# EAGLE board SparkFun_XBee_Arduino_Shield_Qwiic-Panel (EAGLE 9.6.2), part 1 of 3
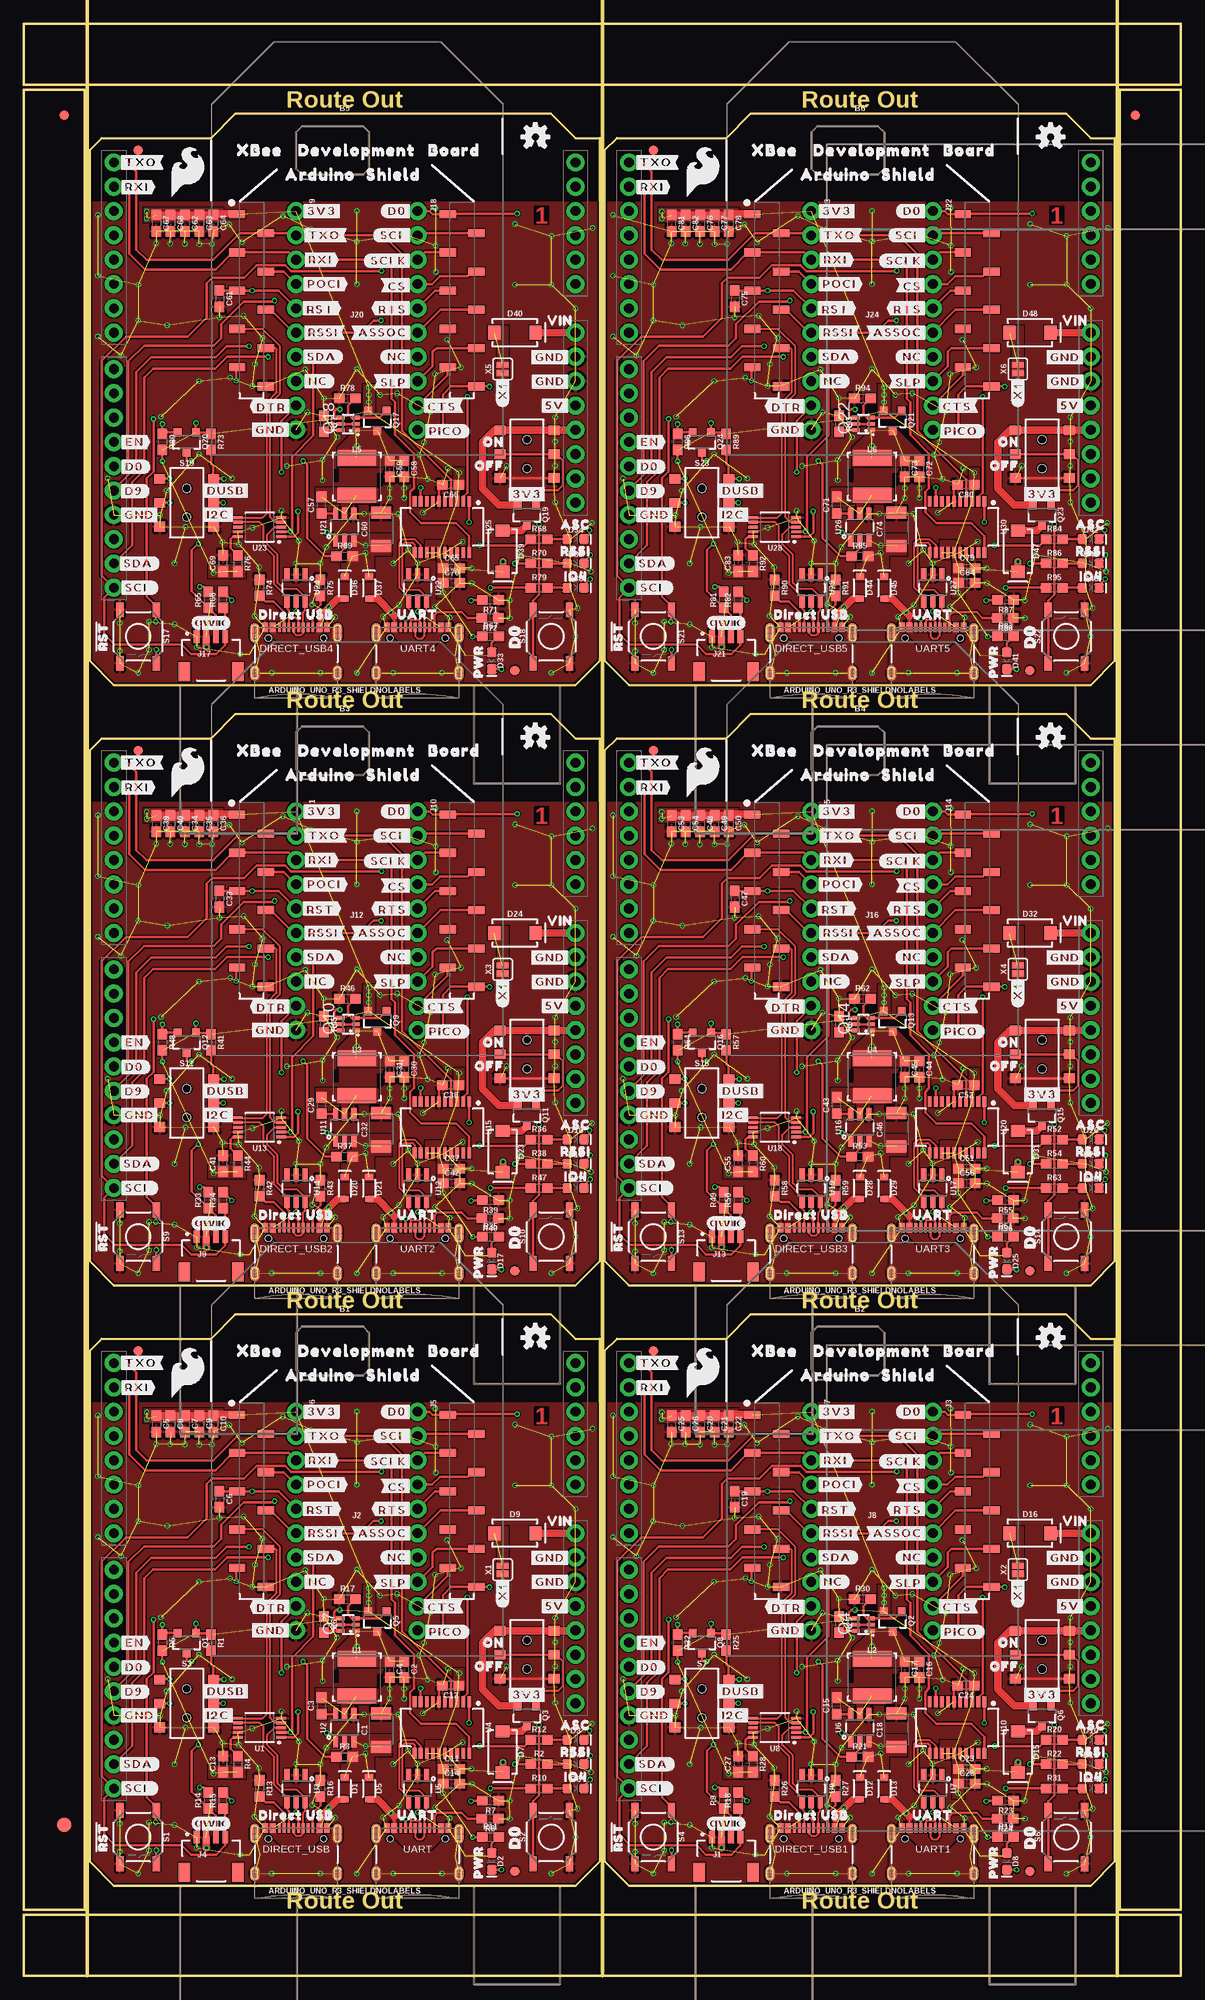
[diagram p0: board, top side]
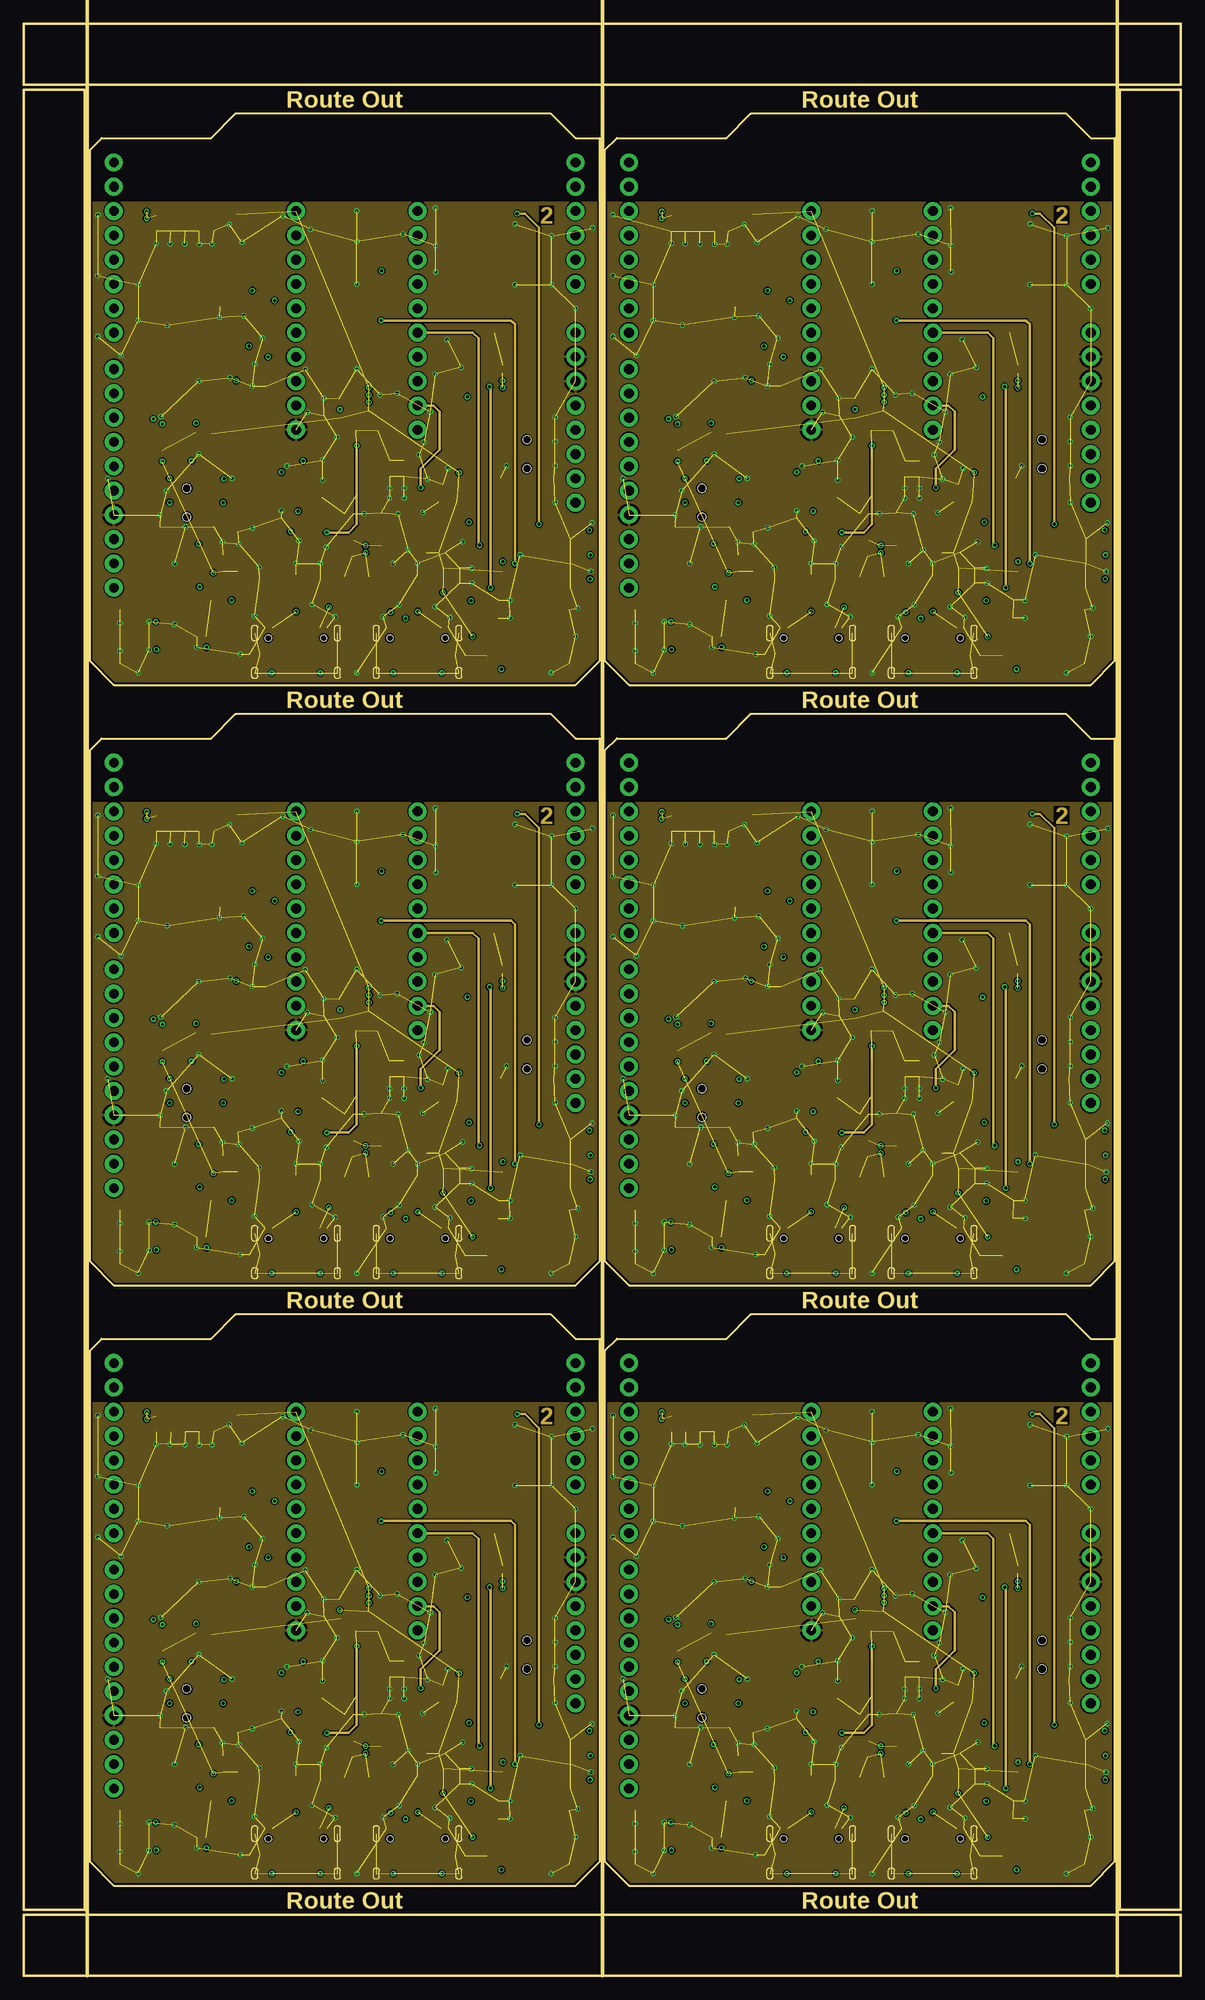
[diagram p1: board, inner layer Route2]
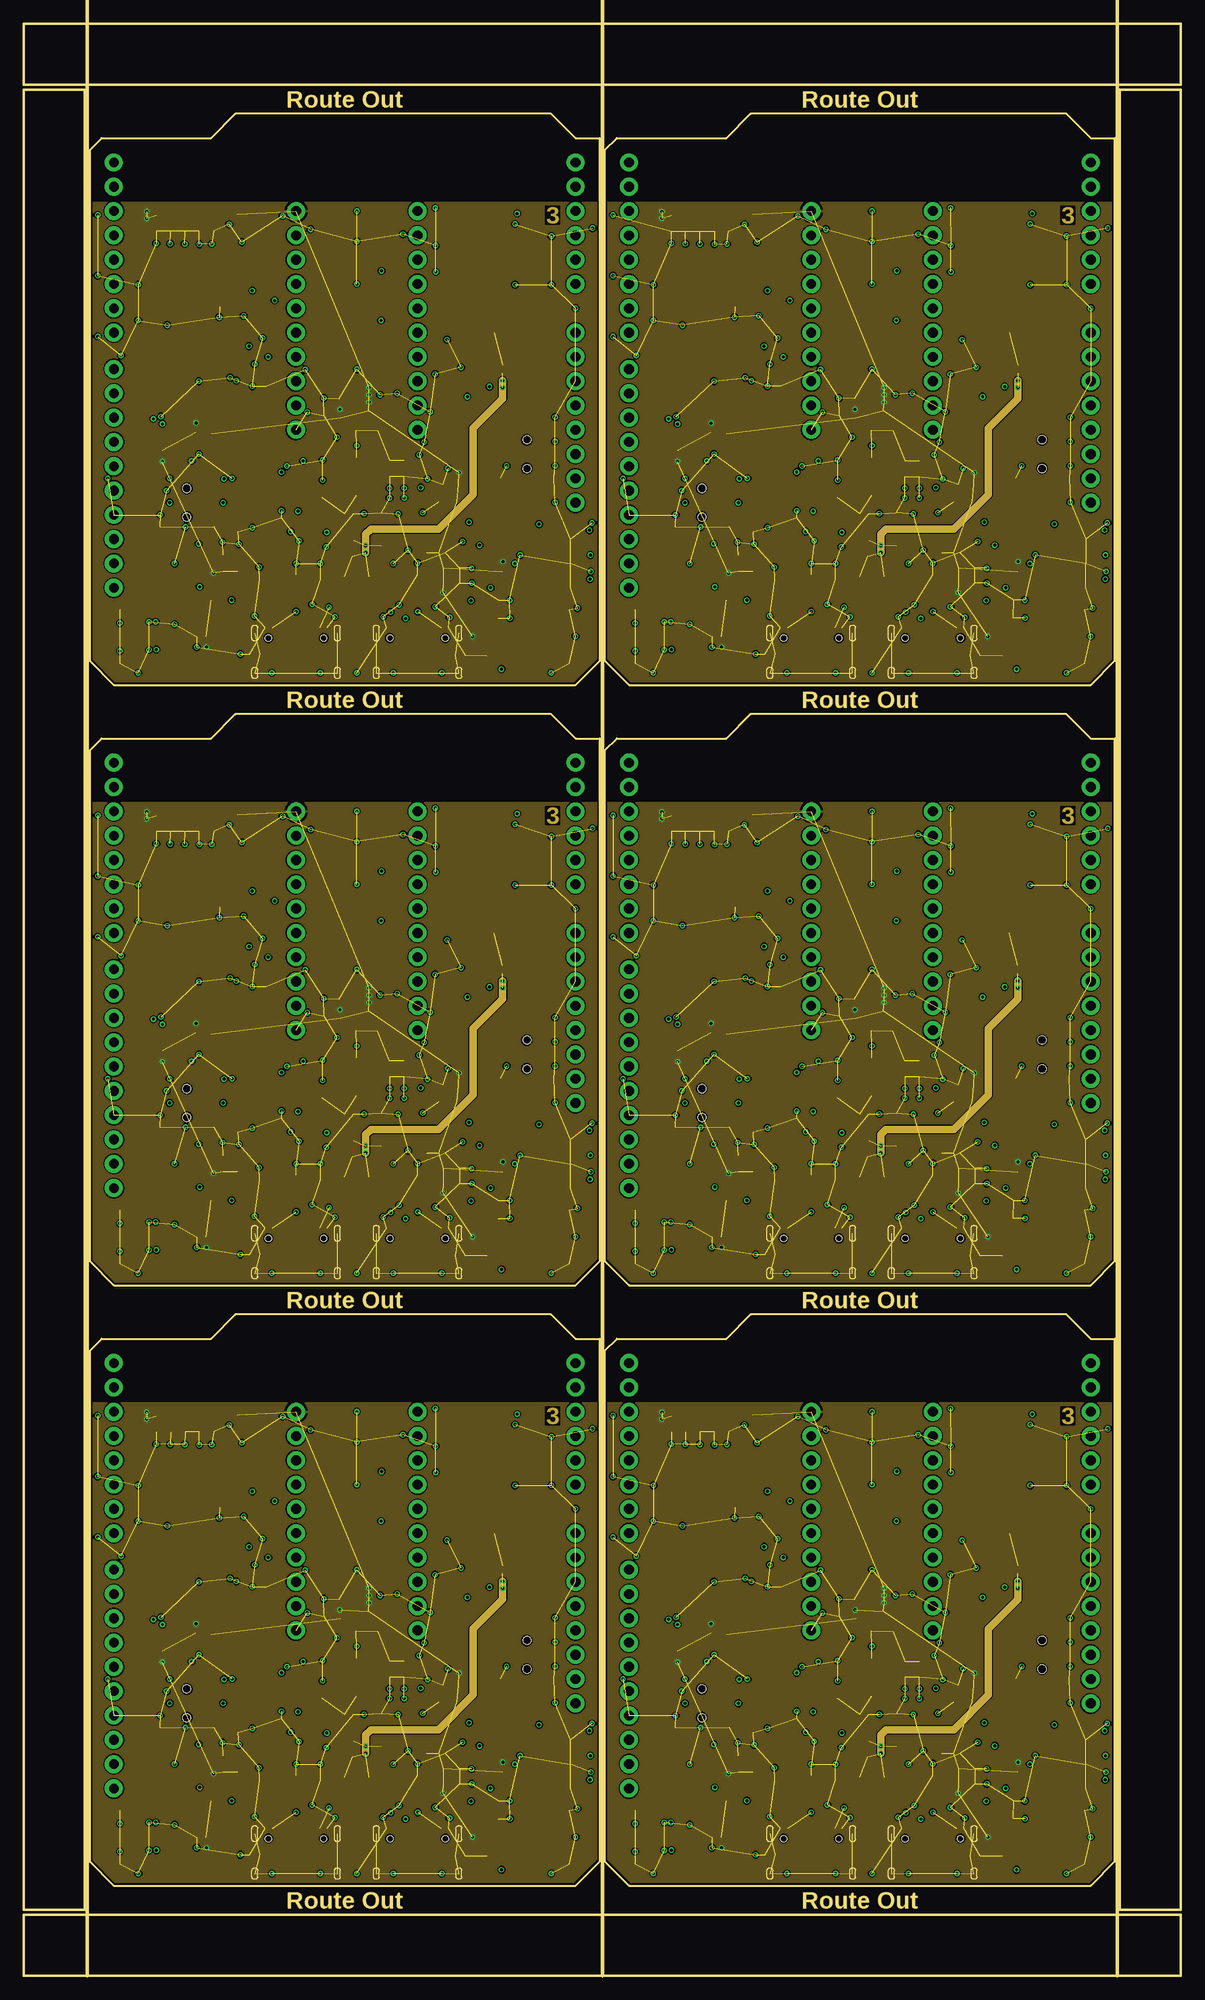
[diagram p2: board, inner layer Route15]
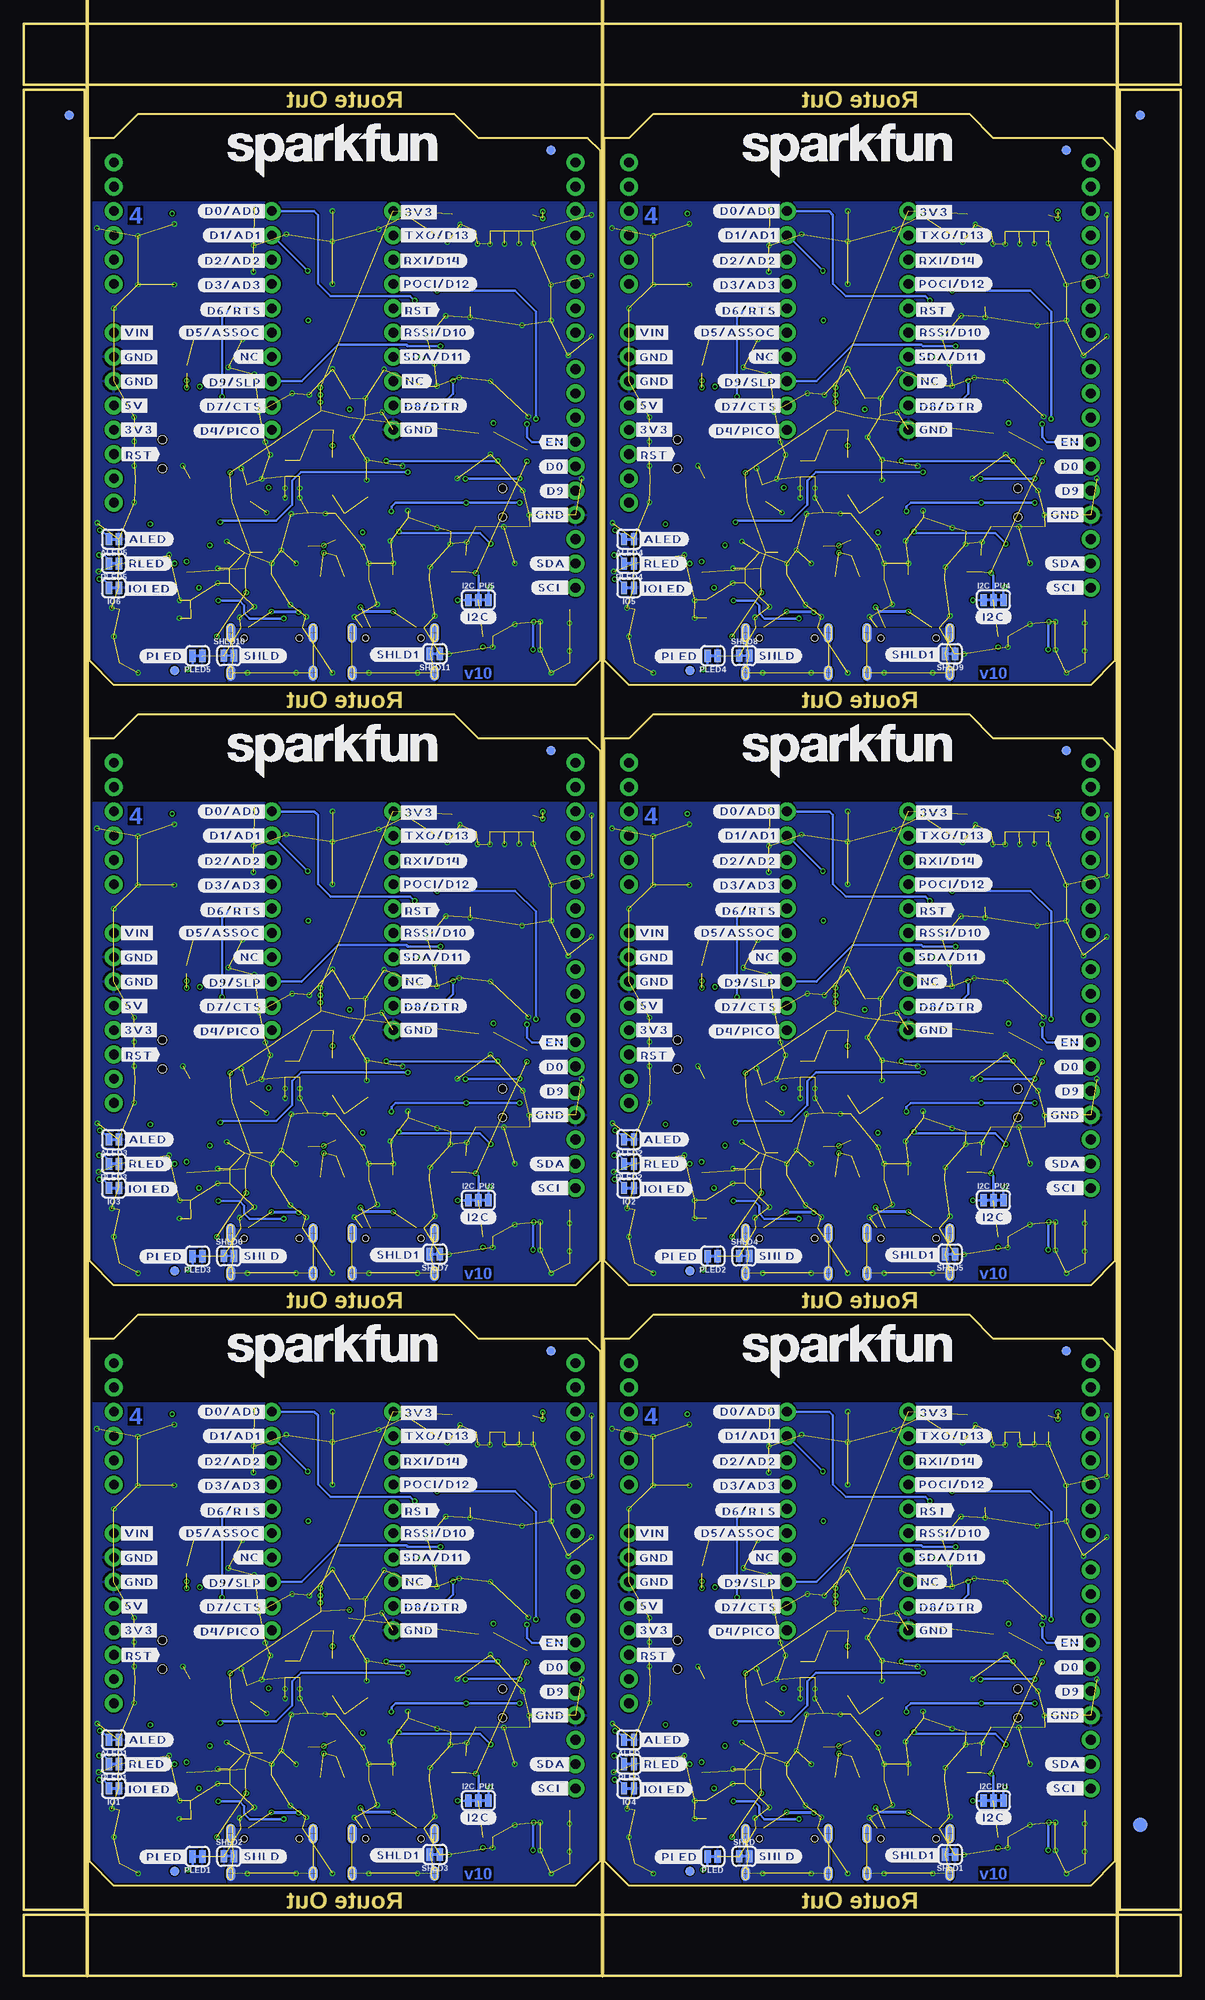
[diagram p3: board, bottom side, seen from below]

Size 120.9 x 203.96 mm. Coordinates in mm from the lower left corner, seen from the top.
Outline: 6.86,65.28 6.86,11.94 9.4,9.4 57.66,9.4 60.2,11.94 60.2,66.55 57.66,66.55 55.12,69.09 22.1,69.09 19.56,66.55 8.13,66.55 6.86,65.28
Outline: 60.71,65.28 60.71,11.94 63.25,9.4 111.51,9.4 114.05,11.94 114.05,66.55 111.51,66.55 108.97,69.09 75.95,69.09 73.41,66.55 61.98,66.55 60.71,65.28
Outline: 6.86,128.02 6.86,74.68 9.4,72.14 57.66,72.14 60.2,74.68 60.2,129.29 57.66,129.29 55.12,131.83 22.1,131.83 19.56,129.29 8.13,129.29 6.86,128.02
Outline: 60.71,128.02 60.71,74.68 63.25,72.14 111.51,72.14 114.05,74.68 114.05,129.29 111.51,129.29 108.97,131.83 75.95,131.83 73.41,129.29 61.98,129.29 60.71,128.02
Outline: 6.86,190.75 6.86,137.41 9.4,134.87 57.66,134.87 60.2,137.41 60.2,192.02 57.66,192.02 55.12,194.56 22.1,194.56 19.56,192.02 8.13,192.02 6.86,190.75
Outline: 60.71,190.75 60.71,137.41 63.25,134.87 111.51,134.87 114.05,137.41 114.05,192.02 111.51,192.02 108.97,194.56 75.95,194.56 73.41,192.02 61.98,192.02 60.71,190.75
Outline: 0,6.35 120.9,6.35 120.9,0 0,0 0,6.35
Outline: 114.55,197.1 120.9,197.1 120.9,6.86 114.55,6.86 114.55,197.1
Outline: 0,203.96 120.9,203.96 120.9,197.61 0,197.61 0,203.96
Outline: 0,197.1 6.35,197.1 6.35,6.86 0,6.86 0,197.1
Copper layers (1*2*15*16): Top 0.035559375mm / dielectric 0.47751875mm / Route2 0.035559375mm / dielectric 0.47751875mm / Route15 0.035559375mm / dielectric 0.47751875mm / Bottom 0.035559375mm
Design rules "SparkFun_XBee_Arduino_Shield_Qwiic": minimum track width 5mil, minimum drill 0.2mm, track to track 5mil, track to pad 5mil, pad to pad 5mil, via to via 5mil, smd to smd 5mil, copper to edge 7mil, drill to drill 7mil, minimum pad ring 5mil, minimum via ring 5mil, stop-mask expansion 2.5mil, vias tented up to drill 25mil, thermal gap 10mil
Net classes: 2 Diff pairs: width 0.203 mm, drill 0.305 mm, clearance 0.152 mm
tRestrict: area 37,30.3 to 37.4,31.4; area 32.4,30.7 to 32.8,31.9; area 90.9,30.3 to 91.3,31.4; area 86.2,30.7 to 86.6,31.9; area 37,93 to 37.4,94.2; area 32.4,93.4 to 32.8,94.6; area 90.9,93 to 91.3,94.2; area 86.2,93.4 to 86.6,94.6; area 37,155.8 to 37.4,156.9; area 32.4,156.2 to 32.8,157.3; area 90.9,155.8 to 91.3,156.9; area 86.2,156.2 to 86.6,157.3
Milling: 4 lines

## Footprints (pad centres in the part's own frame; a part is rotated, then mirrored left to right if it is on the bottom)
SMT-JUMPER_2_NC_TRACE_SILK = smd 0.66 x 1.27: 1 -0.521,0; 2 0.521,0
UNO_R3_SHIELD_NOLABELS = drill 1.016 pad 1.88: 3.3V 24.13,-3.81; 5V 24.13,-1.27; A0 24.13,11.43; A1 24.13,13.97; A2 24.13,16.51; A3 24.13,19.05; A4 24.13,21.59; A5 24.13,24.13; AREF -24.13,-15.24; D2 -24.13,19.05; D3 -24.13,16.51; D4 -24.13,13.97; D5 -24.13,11.43; D6 -24.13,8.89; D7 -24.13,6.35; D8 -24.13,2.54; D9 -24.13,0; D10 -24.13,-2.54; D11 -24.13,-5.08; D12 -24.13,-7.62; D13 -24.13,-10.16; GND@0 24.13,1.27; GND@1 24.13,3.81; GND@2 -24.13,-12.7; IOREF 24.13,-8.89; NC 24.13,-11.43; RES 24.13,-6.35; RX -24.13,24.13; SCL -24.13,-20.32; SDA -24.13,-17.78; TX -24.13,21.59; VIN 24.13,6.35
1210 = smd 1.27 x 2.06: 1 -1.755,0; 2 1.755,0
0603 = smd 1.1 x 1: 1 -0.85,0; 2 0.85,0
SOD-323 = smd 0.63 x 0.83: A 1.15,0; C -1.15,0
LED-0603 = smd 1 x 1: A -0.877,0; C 0.877,0
SMA-DIODE = smd 1.27 x 1.47: A -2.15,0; C 2.15,0
USB-C-16P-4LAYER-ISOLATED = smd 0.3 x 1: A5 -1.25,-0.34; A6 -0.25,-0.34; A7 0.25,-0.34; A8 1.25,-0.34; B5 1.75,-0.34; B6 0.75,-0.34; B7 -0.75,-0.34; B8 -1.75,-0.34 | smd 0.6 x 1: GND -3.225,-0.34; GND2 3.225,-0.34; VBUS1 -2.45,-0.34; VBUS2 2.45,-0.34 | smd 1 x 2.1: SHLD1 -4.32,-0.915; SHLD2 4.32,-0.915 | smd 1 x 2.1 bottom: SHLD3 -4.32,-0.915; SHLD4 4.32,-0.915 | smd 1 x 1.6: SHLD5 -4.32,-5.095; SHLD8 4.32,-5.095 | smd 1 x 1.6 bottom: SHLD6 -4.32,-5.095; SHLD7 4.32,-5.095 | hole 0.65: -2.89,-1.445; 2.89,-1.445
FIDUCIAL-1X2 = smd 1 x 1: 1 0,0
FIDUCIAL-1.5X3 = smd 1.5 x 1.5: 1 0,0
SMT-JUMPER_3_2-NC_TRACE_SILK = smd 0.66 x 1.27: 1 -1.041,0; 2 0,0; 3 1.041,0
JST04_1MM_RA = smd 0.6 x 1.35: 1 -1.5,0; 2 -0.5,0; 3 0.5,0; 4 1.5,0 | smd 1.2 x 2: NC1 2.8,-3.675; NC2 -2.8,-3.675
XBEE3-SMD = smd 1.7 x 0.85: 1 -12.5,11.11; 2 -9.5,9.11; 3 -12.5,7.11; 4 -9.5,5.11; 5 -12.5,3.11; 6 -9.5,1.11; 7 -12.5,-0.89; 8 -9.5,-2.89; 9 -12.5,-4.89; 10 -9.5,-6.89; 11 12.5,-6.89; 12 9.5,-4.89; 13 12.5,-2.89; 14 9.5,-0.89; 15 12.5,1.11; 16 9.5,3.11; 17 12.5,5.11; 18 9.5,7.11; 19 12.5,9.11; 20 9.5,11.11
1X10_NO_SILK = drill 1.016 pad 1.88: 1 0,0; 2 2.54,0; 3 5.08,0; 4 7.62,0; 5 10.16,0; 6 12.7,0; 7 15.24,0; 8 17.78,0; 9 20.32,0; 10 22.86,0
INDUCTOR_3.9UH = smd 4 x 1.6: P$1 0,-2; P$2 0,1.9
SOT23-3 = smd 0.8 x 0.9: 1 -0.95,-1; 2 0.95,-1; 3 0,1.1
SOT363_PHILIPS = smd 0.4 x 0.8: 1 -0.65,-0.8; 2 0,-0.8; 3 0.65,-0.8; 4 0.65,0.8; 5 0,0.8; 6 -0.65,0.8
TACTILE_SWITCH_SMD_5.2MM = smd 1.524 x 0.762: 1 -2.794,1.905; 2 2.794,1.905; 3 -2.794,-1.905; 4 2.794,-1.905
SWITCH_DPDT_SMD_AYZ0202 = smd 1 x 1.15: 1 -2.5,2.825; 2 0,2.825; 3 2.5,2.825; 4 -2.5,-2.825; 5 0,-2.825; 6 2.5,-2.825 | hole 0.85: 1.5,0; -1.5,0
MSOP10 = smd 1 x 0.3: 1 -2.25,1; 2 -2.25,0.5; 3 -2.25,0; 4 -2.25,-0.5; 5 -2.25,-1; 6 2.25,-1; 7 2.25,-0.5; 8 2.25,0; 9 2.25,0.5; 10 2.25,1
SOT23-6 = smd 0.55 x 1.35: 1 -0.95,-1.375; 2 0,-1.375; 3 0.95,-1.375; 4 0.95,1.375; 5 0,1.375; 6 -0.95,1.375
SOT-23-6 = smd 0.55 x 1.35: 1 -0.95,-1.375; 2 0,-1.375; 3 0.95,-1.375; 4 0.95,1.375; 5 0,1.375; 6 -0.95,1.375
SSOP20_L = smd 0.381 x 1.143: 1 -2.857,-2.68; 2 -2.223,-2.68; 3 -1.587,-2.68; 4 -0.953,-2.68; 5 -0.318,-2.68; 6 0.318,-2.68; 7 0.953,-2.68; 8 1.587,-2.68; 9 2.223,-2.68; 10 2.857,-2.68; 11 2.857,2.68; 12 2.223,2.68; 13 1.587,2.68; 14 0.953,2.68; 15 0.318,2.68; 16 -0.318,2.68; 17 -0.953,2.68; 18 -1.587,2.68; 19 -2.223,2.68; 20 -2.857,2.68
SMT-JUMPER_2_NO_SILK = smd 0.635 x 1.27: 1 -0.406,0; 2 0.406,0

## Placement (x,y rotation side)
ALED  JUMPER-SMT_2_NC_TRACE_SILK  [SMT-JUMPER_2_NC_TRACE_SILK]  57.66,24.64 180 bottom
ALED1  JUMPER-SMT_2_NC_TRACE_SILK  [SMT-JUMPER_2_NC_TRACE_SILK]  111.51,24.64 180 bottom
ALED2  JUMPER-SMT_2_NC_TRACE_SILK  [SMT-JUMPER_2_NC_TRACE_SILK]  57.66,87.38 180 bottom
ALED3  JUMPER-SMT_2_NC_TRACE_SILK  [SMT-JUMPER_2_NC_TRACE_SILK]  111.51,87.38 180 bottom
ALED4  JUMPER-SMT_2_NC_TRACE_SILK  [SMT-JUMPER_2_NC_TRACE_SILK]  57.66,150.11 180 bottom
ALED5  JUMPER-SMT_2_NC_TRACE_SILK  [SMT-JUMPER_2_NC_TRACE_SILK]  111.51,150.11 180 bottom
B1  ARDUINO_UNO_R3_SHIELDNOLABELS  [UNO_R3_SHIELD_NOLABELS]  33.53,39.88 0 top
B2  ARDUINO_UNO_R3_SHIELDNOLABELS  [UNO_R3_SHIELD_NOLABELS]  87.38,39.88 0 top
B3  ARDUINO_UNO_R3_SHIELDNOLABELS  [UNO_R3_SHIELD_NOLABELS]  33.53,102.62 0 top
B4  ARDUINO_UNO_R3_SHIELDNOLABELS  [UNO_R3_SHIELD_NOLABELS]  87.38,102.62 0 top
B5  ARDUINO_UNO_R3_SHIELDNOLABELS  [UNO_R3_SHIELD_NOLABELS]  33.53,165.35 0 top
B6  ARDUINO_UNO_R3_SHIELDNOLABELS  [UNO_R3_SHIELD_NOLABELS]  87.38,165.35 0 top
C1  10uF  [1210]  37.34,25.65 90 top
C2  22uF  [0603]  39.75,32 270 top
C3  0.1uF  [0603]  31.12,28.19 90 top
C4  22uF  [0603]  38.23,32 270 top
C5  47pF  [0603]  13.84,57.66 270 top
C6  10nF  [0603]  20.45,49.78 270 top
C7  10nF  [0603]  16.84,57.66 270 top
C8  10pF  [0603]  15.32,57.66 270 top
C9  0.1uF  [0603]  18.34,57.66 270 top
C10  10uF  [0603]  19.81,57.66 270 top
C11  0.1uF  [0603]  44.7,21.59 0 top
C12  0.1uF  [0603]  44.6,30.33 180 top
C13  0.1uF  [0603]  20.83,22.1 90 top
C14  4.7uF  [0603]  44.7,20.07 0 top
C15  0.1uF  [0603]  84.96,28.19 90 top
C16  22uF  [0603]  93.6,32 270 top
C17  22uF  [0603]  92.08,32 270 top
C18  10uF  [1210]  91.19,25.65 90 top
C19  10nF  [0603]  74.3,49.78 270 top
C20  10nF  [0603]  70.69,57.66 270 top
C21  0.1uF  [0603]  72.19,57.66 270 top
C22  10uF  [0603]  73.66,57.66 270 top
C23  0.1uF  [0603]  98.55,21.59 0 top
C24  0.1uF  [0603]  98.45,30.33 180 top
C25  47pF  [0603]  67.69,57.66 270 top
C26  10pF  [0603]  69.16,57.66 270 top
C27  0.1uF  [0603]  74.68,22.1 90 top
C28  4.7uF  [0603]  98.55,20.07 0 top
C29  0.1uF  [0603]  31.12,90.93 90 top
C30  22uF  [0603]  39.75,94.74 270 top
C31  22uF  [0603]  38.23,94.74 270 top
C32  10uF  [1210]  37.34,88.39 90 top
C33  10nF  [0603]  20.45,112.52 270 top
C34  10nF  [0603]  16.84,120.4 270 top
C35  0.1uF  [0603]  18.34,120.4 270 top
C36  10uF  [0603]  19.81,120.4 270 top
C37  0.1uF  [0603]  44.7,84.33 0 top
C38  0.1uF  [0603]  44.6,93.07 180 top
C39  47pF  [0603]  13.84,120.4 270 top
C40  10pF  [0603]  15.32,120.4 270 top
C41  0.1uF  [0603]  20.83,84.84 90 top
C42  4.7uF  [0603]  44.7,82.8 0 top
C43  0.1uF  [0603]  84.96,90.93 90 top
C44  22uF  [0603]  93.6,94.74 270 top
C45  22uF  [0603]  92.08,94.74 270 top
C46  10uF  [1210]  91.19,88.39 90 top
C47  10nF  [0603]  74.3,112.52 270 top
C48  10nF  [0603]  70.69,120.4 270 top
C49  0.1uF  [0603]  72.19,120.4 270 top
C50  10uF  [0603]  73.66,120.4 270 top
C51  0.1uF  [0603]  98.55,84.33 0 top
C52  0.1uF  [0603]  98.45,93.07 180 top
C53  47pF  [0603]  67.69,120.4 270 top
C54  10pF  [0603]  69.16,120.4 270 top
C55  0.1uF  [0603]  74.68,84.84 90 top
C56  4.7uF  [0603]  98.55,82.8 0 top
C57  0.1uF  [0603]  31.12,153.67 90 top
C58  22uF  [0603]  39.75,157.48 270 top
C59  22uF  [0603]  38.23,157.48 270 top
C60  10uF  [1210]  37.34,151.13 90 top
C61  10nF  [0603]  20.45,175.26 270 top
C62  10nF  [0603]  16.84,183.13 270 top
C63  0.1uF  [0603]  18.34,183.13 270 top
C64  10uF  [0603]  19.81,183.13 270 top
C65  0.1uF  [0603]  44.7,147.07 0 top
C66  0.1uF  [0603]  44.6,155.8 180 top
C67  47pF  [0603]  13.84,183.13 270 top
C68  10pF  [0603]  15.32,183.13 270 top
C69  0.1uF  [0603]  20.83,147.57 90 top
C70  4.7uF  [0603]  44.7,145.54 0 top
C71  0.1uF  [0603]  84.96,153.67 90 top
C72  22uF  [0603]  93.6,157.48 270 top
C73  22uF  [0603]  92.08,157.48 270 top
C74  10uF  [1210]  91.19,151.13 90 top
C75  10nF  [0603]  74.3,175.26 270 top
C76  10nF  [0603]  70.69,183.13 270 top
C77  0.1uF  [0603]  72.19,183.13 270 top
C78  10uF  [0603]  73.66,183.13 270 top
C79  0.1uF  [0603]  98.55,147.07 0 top
C80  0.1uF  [0603]  98.45,155.8 180 top
C81  47pF  [0603]  67.69,183.13 270 top
C82  10pF  [0603]  69.16,183.13 270 top
C83  0.1uF  [0603]  74.68,147.57 90 top
C84  4.7uF  [0603]  98.55,145.54 0 top
D1  3A/10V/280mV  [SOD-323]  33.53,19.56 270 top
D2  RED  [LED-0603]  48.89,11.94 270 top
D3  BLUE  [LED-0603]  57.66,24.64 0 top
D4  Yellow  [LED-0603]  57.66,22.1 0 top
D5  3A/10V/280mV  [SOD-323]  36.07,19.56 270 top
D6  GREEN  [LED-0603]  57.66,19.56 0 top
D7  3A/40V/500mV  [SMA-DIODE]  50.04,23.37 270 top
D8  RED  [LED-0603]  102.74,11.94 270 top
D9  3A/40V/500mV  [SMA-DIODE]  51.31,46.23 0 top
D10  BLUE  [LED-0603]  111.51,24.64 0 top
D11  Yellow  [LED-0603]  111.51,22.1 0 top
D12  3A/10V/280mV  [SOD-323]  87.38,19.56 270 top
D13  3A/10V/280mV  [SOD-323]  89.92,19.56 270 top
D14  GREEN  [LED-0603]  111.51,19.56 0 top
D15  3A/40V/500mV  [SMA-DIODE]  103.89,23.37 270 top
D16  3A/40V/500mV  [SMA-DIODE]  105.16,46.23 0 top
D17  RED  [LED-0603]  48.89,74.68 270 top
D18  BLUE  [LED-0603]  57.66,87.38 0 top
D19  Yellow  [LED-0603]  57.66,84.84 0 top
D20  3A/10V/280mV  [SOD-323]  33.53,82.3 270 top
D21  3A/10V/280mV  [SOD-323]  36.07,82.3 270 top
D22  GREEN  [LED-0603]  57.66,82.3 0 top
D23  3A/40V/500mV  [SMA-DIODE]  50.04,86.11 270 top
D24  3A/40V/500mV  [SMA-DIODE]  51.31,108.97 0 top
D25  RED  [LED-0603]  102.74,74.68 270 top
D26  BLUE  [LED-0603]  111.51,87.38 0 top
D27  Yellow  [LED-0603]  111.51,84.84 0 top
D28  3A/10V/280mV  [SOD-323]  87.38,82.3 270 top
D29  3A/10V/280mV  [SOD-323]  89.92,82.3 270 top
D30  GREEN  [LED-0603]  111.51,82.3 0 top
D31  3A/40V/500mV  [SMA-DIODE]  103.89,86.11 270 top
D32  3A/40V/500mV  [SMA-DIODE]  105.16,108.97 0 top
D33  RED  [LED-0603]  48.89,137.41 270 top
D34  BLUE  [LED-0603]  57.66,150.11 0 top
D35  Yellow  [LED-0603]  57.66,147.57 0 top
D36  3A/10V/280mV  [SOD-323]  33.53,145.03 270 top
D37  3A/10V/280mV  [SOD-323]  36.07,145.03 270 top
D38  GREEN  [LED-0603]  57.66,145.03 0 top
D39  3A/40V/500mV  [SMA-DIODE]  50.04,148.84 270 top
D40  3A/40V/500mV  [SMA-DIODE]  51.31,171.7 0 top
D41  RED  [LED-0603]  102.74,137.41 270 top
D42  BLUE  [LED-0603]  111.51,150.11 0 top
D43  Yellow  [LED-0603]  111.51,147.57 0 top
D44  3A/10V/280mV  [SOD-323]  87.38,145.03 270 top
D45  3A/10V/280mV  [SOD-323]  89.92,145.03 270 top
D46  GREEN  [LED-0603]  111.51,145.03 0 top
D47  3A/40V/500mV  [SMA-DIODE]  103.89,148.84 270 top
D48  3A/40V/500mV  [SMA-DIODE]  105.16,171.7 0 top
DIRECT_USB  USB Female Type C Connector  [USB-C-16P-4LAYER-ISOLATED]  28.45,15.75 0 top
DIRECT_USB1  USB Female Type C Connector  [USB-C-16P-4LAYER-ISOLATED]  82.3,15.75 0 top
DIRECT_USB2  USB Female Type C Connector  [USB-C-16P-4LAYER-ISOLATED]  28.45,78.49 0 top
DIRECT_USB3  USB Female Type C Connector  [USB-C-16P-4LAYER-ISOLATED]  82.3,78.49 0 top
DIRECT_USB4  USB Female Type C Connector  [USB-C-16P-4LAYER-ISOLATED]  28.45,141.22 0 top
DIRECT_USB5  USB Female Type C Connector  [USB-C-16P-4LAYER-ISOLATED]  82.3,141.22 0 top
E$1  [FIDUCIAL-1X2]  4.23,194.44 0 top
E$2  [FIDUCIAL-1X2]  4.23,194.44 0 bottom
E$3  [FIDUCIAL-1X2]  116.16,194.44 0 top
E$4  [FIDUCIAL-1X2]  116.16,194.44 0 bottom
E$5  [FIDUCIAL-1.5X3]  4.23,15.75 0 top
E$6  [FIDUCIAL-1.5X3]  4.23,15.75 0 bottom
FD1  FIDUCIAL1X2  [FIDUCIAL-1X2]  11.94,65.28 0 top
FD2  FIDUCIAL1X2  [FIDUCIAL-1X2]  11.94,65.28 0 bottom
FD3  FIDUCIAL1X2  [FIDUCIAL-1X2]  51.31,10.92 0 top
FD4  FIDUCIAL1X2  [FIDUCIAL-1X2]  51.31,10.92 0 bottom
FD5  FIDUCIAL1X2  [FIDUCIAL-1X2]  65.79,65.28 0 top
FD6  FIDUCIAL1X2  [FIDUCIAL-1X2]  65.79,65.28 0 bottom
FD7  FIDUCIAL1X2  [FIDUCIAL-1X2]  105.16,10.92 0 top
FD8  FIDUCIAL1X2  [FIDUCIAL-1X2]  105.16,10.92 0 bottom
FD9  FIDUCIAL1X2  [FIDUCIAL-1X2]  11.94,128.02 0 top
FD10  FIDUCIAL1X2  [FIDUCIAL-1X2]  11.94,128.02 0 bottom
FD11  FIDUCIAL1X2  [FIDUCIAL-1X2]  51.31,73.66 0 top
FD12  FIDUCIAL1X2  [FIDUCIAL-1X2]  51.31,73.66 0 bottom
FD13  FIDUCIAL1X2  [FIDUCIAL-1X2]  65.79,128.02 0 top
FD14  FIDUCIAL1X2  [FIDUCIAL-1X2]  65.79,128.02 0 bottom
FD15  FIDUCIAL1X2  [FIDUCIAL-1X2]  105.16,73.66 0 top
FD16  FIDUCIAL1X2  [FIDUCIAL-1X2]  105.16,73.66 0 bottom
FD17  FIDUCIAL1X2  [FIDUCIAL-1X2]  11.94,190.75 0 top
FD18  FIDUCIAL1X2  [FIDUCIAL-1X2]  11.94,190.75 0 bottom
FD19  FIDUCIAL1X2  [FIDUCIAL-1X2]  51.31,136.4 0 top
FD20  FIDUCIAL1X2  [FIDUCIAL-1X2]  51.31,136.4 0 bottom
FD21  FIDUCIAL1X2  [FIDUCIAL-1X2]  65.79,190.75 0 top
FD22  FIDUCIAL1X2  [FIDUCIAL-1X2]  65.79,190.75 0 bottom
FD23  FIDUCIAL1X2  [FIDUCIAL-1X2]  105.16,136.4 0 top
FD24  FIDUCIAL1X2  [FIDUCIAL-1X2]  105.16,136.4 0 bottom
I2C_PU  JUMPER-SMT_3_2-NC_TRACE_SILK  [SMT-JUMPER_3_2-NC_TRACE_SILK]  19.56,18.29 0 bottom
I2C_PU1  JUMPER-SMT_3_2-NC_TRACE_SILK  [SMT-JUMPER_3_2-NC_TRACE_SILK]  73.41,18.29 0 bottom
I2C_PU2  JUMPER-SMT_3_2-NC_TRACE_SILK  [SMT-JUMPER_3_2-NC_TRACE_SILK]  19.56,81.03 0 bottom
I2C_PU3  JUMPER-SMT_3_2-NC_TRACE_SILK  [SMT-JUMPER_3_2-NC_TRACE_SILK]  73.41,81.03 0 bottom
I2C_PU4  JUMPER-SMT_3_2-NC_TRACE_SILK  [SMT-JUMPER_3_2-NC_TRACE_SILK]  19.56,143.76 0 bottom
I2C_PU5  JUMPER-SMT_3_2-NC_TRACE_SILK  [SMT-JUMPER_3_2-NC_TRACE_SILK]  73.41,143.76 0 bottom
IO1  JUMPER-SMT_2_NC_TRACE_SILK  [SMT-JUMPER_2_NC_TRACE_SILK]  111.51,19.56 180 bottom
IO2  JUMPER-SMT_2_NC_TRACE_SILK  [SMT-JUMPER_2_NC_TRACE_SILK]  57.66,82.3 180 bottom
IO3  JUMPER-SMT_2_NC_TRACE_SILK  [SMT-JUMPER_2_NC_TRACE_SILK]  111.51,82.3 180 bottom
IO4  JUMPER-SMT_2_NC_TRACE_SILK  [SMT-JUMPER_2_NC_TRACE_SILK]  57.66,19.56 180 bottom
IO5  JUMPER-SMT_2_NC_TRACE_SILK  [SMT-JUMPER_2_NC_TRACE_SILK]  57.66,145.03 180 bottom
IO6  JUMPER-SMT_2_NC_TRACE_SILK  [SMT-JUMPER_2_NC_TRACE_SILK]  111.51,145.03 180 bottom
J1  QWIIC_RIGHT_ANGLE  [JST04_1MM_RA]  73.41,14.48 0 top
J2  [XBEE3-SMD]  34.8,47.5 0 top
J3  [1X10_NO_SILK]  95,58.93 270 top
J4  QWIIC_RIGHT_ANGLE  [JST04_1MM_RA]  19.56,14.48 0 top
J5  [1X10_NO_SILK]  41.15,58.93 270 top
J6  [1X10_NO_SILK]  28.45,58.93 270 top
J7  [1X10_NO_SILK]  82.3,58.93 270 top
J8  [XBEE3-SMD]  88.65,47.5 0 top
J9  QWIIC_RIGHT_ANGLE  [JST04_1MM_RA]  19.56,77.22 0 top
J10  [1X10_NO_SILK]  41.15,121.67 270 top
J11  [1X10_NO_SILK]  28.45,121.67 270 top
J12  [XBEE3-SMD]  34.8,110.24 0 top
J13  QWIIC_RIGHT_ANGLE  [JST04_1MM_RA]  73.41,77.22 0 top
J14  [1X10_NO_SILK]  95,121.67 270 top
J15  [1X10_NO_SILK]  82.3,121.67 270 top
J16  [XBEE3-SMD]  88.65,110.24 0 top
J17  QWIIC_RIGHT_ANGLE  [JST04_1MM_RA]  19.56,139.95 0 top
J18  [1X10_NO_SILK]  41.15,184.4 270 top
J19  [1X10_NO_SILK]  28.45,184.4 270 top
J20  [XBEE3-SMD]  34.8,172.97 0 top
J21  QWIIC_RIGHT_ANGLE  [JST04_1MM_RA]  73.41,139.95 0 top
J22  [1X10_NO_SILK]  95,184.4 270 top
J23  [1X10_NO_SILK]  82.3,184.4 270 top
J24  [XBEE3-SMD]  88.65,172.97 0 top
L1  3.9UH  [INDUCTOR_3.9UH]  34.8,31.24 0 top
L2  3.9UH  [INDUCTOR_3.9UH]  88.65,31.24 0 top
L3  3.9UH  [INDUCTOR_3.9UH]  34.8,93.98 0 top
L4  3.9UH  [INDUCTOR_3.9UH]  88.65,93.98 0 top
L5  3.9UH  [INDUCTOR_3.9UH]  34.8,156.72 0 top
L6  3.9UH  [INDUCTOR_3.9UH]  88.65,156.72 0 top
LOGO1  SFE_LOGO_NAMEBLANK  [BLANK]  91.95,39.88 0 top
LOGO2  OSHW-LOGOS  [OSHW-LOGO-S]  53.47,66.67 0 top
LOGO3  QWIIC_LOGO_4MM  [QWIIC_4MM]  19.56,15.88 0 top
LOGO4  SPECIAL_INSTRUCTIONS-ORDERING  [ORDERING_INSTRUCTIONS]  83.91,65.9 0 top
LOGO5  OSHW-LOGOS  [OSHW-LOGO-S]  107.31,66.67 0 top
LOGO6  QWIIC_LOGO_4MM  [QWIIC_4MM]  73.41,15.88 0 top
LOGO7  SFE_LOGO_NAMEBLANK  [BLANK]  145.8,39.88 0 top  (outside the outline)
LOGO8  SPECIAL_INSTRUCTIONS-ORDERING  [ORDERING_INSTRUCTIONS]  137.76,65.9 0 top  (outside the outline)
LOGO9  OSHW-LOGOS  [OSHW-LOGO-S]  53.47,129.41 0 top
LOGO10  QWIIC_LOGO_4MM  [QWIIC_4MM]  19.56,78.61 0 top
LOGO11  SFE_LOGO_NAMEBLANK  [BLANK]  91.95,102.62 0 top
LOGO12  SPECIAL_INSTRUCTIONS-ORDERING  [ORDERING_INSTRUCTIONS]  83.91,128.64 0 top
LOGO13  OSHW-LOGOS  [OSHW-LOGO-S]  107.31,129.41 0 top
LOGO14  QWIIC_LOGO_4MM  [QWIIC_4MM]  73.41,78.61 0 top
LOGO15  SFE_LOGO_NAMEBLANK  [BLANK]  145.8,102.62 0 top  (outside the outline)
LOGO16  SPECIAL_INSTRUCTIONS-ORDERING  [ORDERING_INSTRUCTIONS]  137.76,128.64 0 top  (outside the outline)
LOGO17  OSHW-LOGOS  [OSHW-LOGO-S]  53.47,192.15 0 top
LOGO18  QWIIC_LOGO_4MM  [QWIIC_4MM]  19.56,141.35 0 top
LOGO19  SFE_LOGO_NAMEBLANK  [BLANK]  91.95,165.35 0 top
LOGO20  SPECIAL_INSTRUCTIONS-ORDERING  [ORDERING_INSTRUCTIONS]  83.91,191.37 0 top
LOGO21  OSHW-LOGOS  [OSHW-LOGO-S]  107.31,192.15 0 top
LOGO22  QWIIC_LOGO_4MM  [QWIIC_4MM]  73.41,141.35 0 top
LOGO23  SFE_LOGO_NAMEBLANK  [BLANK]  145.8,165.35 0 top  (outside the outline)
LOGO24  SPECIAL_INSTRUCTIONS-ORDERING  [ORDERING_INSTRUCTIONS]  137.76,191.37 0 top  (outside the outline)
PLED  JUMPER-SMT_2_NC_TRACE_SILK  [SMT-JUMPER_2_NC_TRACE_SILK]  48.92,12.45 180 bottom
PLED1  JUMPER-SMT_2_NC_TRACE_SILK  [SMT-JUMPER_2_NC_TRACE_SILK]  102.77,12.45 180 bottom
PLED2  JUMPER-SMT_2_NC_TRACE_SILK  [SMT-JUMPER_2_NC_TRACE_SILK]  48.92,75.18 180 bottom
PLED3  JUMPER-SMT_2_NC_TRACE_SILK  [SMT-JUMPER_2_NC_TRACE_SILK]  102.77,75.18 180 bottom
PLED4  JUMPER-SMT_2_NC_TRACE_SILK  [SMT-JUMPER_2_NC_TRACE_SILK]  48.92,137.92 180 bottom
PLED5  JUMPER-SMT_2_NC_TRACE_SILK  [SMT-JUMPER_2_NC_TRACE_SILK]  102.77,137.92 180 bottom
Q1  220mA/50V/3.5Ω  [SOT23-3]  17.02,34.8 180 top
Q2  20V/4.2A/52mΩ/1.4W  [SOT23-3]  90.81,37.06 180 top
Q3  3.1A/30V/105mΩ  [SOT23-3]  52.58,27.18 180 top
Q4  [SOT363_PHILIPS]  87.76,36.68 90 top
Q5  20V/4.2A/52mΩ/1.4W  [SOT23-3]  36.96,37.06 180 top
Q6  3.1A/30V/105mΩ  [SOT23-3]  106.43,27.18 180 top
Q7  [SOT363_PHILIPS]  33.91,36.68 90 top
Q8  220mA/50V/3.5Ω  [SOT23-3]  70.87,34.8 180 top
Q9  20V/4.2A/52mΩ/1.4W  [SOT23-3]  36.96,99.8 180 top
Q10  [SOT363_PHILIPS]  33.91,99.42 90 top
Q11  3.1A/30V/105mΩ  [SOT23-3]  52.58,89.92 180 top
Q12  220mA/50V/3.5Ω  [SOT23-3]  17.02,97.54 180 top
Q13  20V/4.2A/52mΩ/1.4W  [SOT23-3]  90.81,99.8 180 top
Q14  [SOT363_PHILIPS]  87.76,99.42 90 top
Q15  3.1A/30V/105mΩ  [SOT23-3]  106.43,89.92 180 top
Q16  220mA/50V/3.5Ω  [SOT23-3]  70.87,97.54 180 top
Q17  20V/4.2A/52mΩ/1.4W  [SOT23-3]  36.96,162.53 180 top
Q18  [SOT363_PHILIPS]  33.91,162.15 90 top
Q19  3.1A/30V/105mΩ  [SOT23-3]  52.58,152.65 180 top
Q20  220mA/50V/3.5Ω  [SOT23-3]  17.02,160.27 180 top
Q21  20V/4.2A/52mΩ/1.4W  [SOT23-3]  90.81,162.53 180 top
Q22  [SOT363_PHILIPS]  87.76,162.15 90 top
Q23  3.1A/30V/105mΩ  [SOT23-3]  106.43,152.65 180 top
Q24  220mA/50V/3.5Ω  [SOT23-3]  70.87,160.27 180 top
R1  100k  [0603]  19.56,34.8 270 top
R2  2.2k  [0603]  53.85,22.1 0 top
R3  100k  [0603]  33.53,22.86 0 top
R4  100  [0603]  22.35,22.1 270 top
R5  10k  [0603]  14.48,34.8 270 top
R6  100k  [0603]  31.37,36.68 270 top
R7  5.1k  [0603]  48.77,18.29 180 top
R8  5.1k  [0603]  48.72,16.41 180 top
R9  2.2k  [0603]  73.15,18.29 90 top
R10  330  [0603]  53.85,19.56 0 top
R11  4.7k  [0603]  48.77,14.48 0 top
R12  2.2k  [0603]  53.85,24.64 0 top
R13  5.1k  [0603]  24.64,19.56 270 top
R14  2.2k  [0603]  19.3,18.29 90 top
R15  2.2k  [0603]  20.83,18.29 90 top
R16  5.1k  [0603]  30.99,19.56 270 top
R17  1M  [0603]  33.81,39.34 0 top
R18  2.2k  [0603]  74.68,18.29 90 top
R19  4.7k  [0603]  102.62,14.48 0 top
R20  2.2k  [0603]  107.7,24.64 0 top
R21  100k  [0603]  87.38,22.86 0 top
R22  2.2k  [0603]  107.7,22.1 0 top
R23  5.1k  [0603]  102.62,18.29 180 top
R24  5.1k  [0603]  102.57,16.41 180 top
R25  100k  [0603]  73.41,34.8 270 top
R26  5.1k  [0603]  78.49,19.56 270 top
R27  5.1k  [0603]  84.84,19.56 270 top
R28  100  [0603]  76.2,22.1 270 top
R29  100k  [0603]  85.22,36.68 270 top
R30  1M  [0603]  87.66,39.34 0 top
R31  330  [0603]  107.7,19.56 0 top
R32  10k  [0603]  68.33,34.8 270 top
R33  2.2k  [0603]  19.3,81.03 90 top
R34  2.2k  [0603]  20.83,81.03 90 top
R35  4.7k  [0603]  48.77,77.22 0 top
R36  2.2k  [0603]  53.85,87.38 0 top
R37  100k  [0603]  33.53,85.6 0 top
R38  2.2k  [0603]  53.85,84.84 0 top
R39  5.1k  [0603]  48.77,81.03 180 top
R40  5.1k  [0603]  48.72,79.15 180 top
R41  100k  [0603]  19.56,97.54 270 top
R42  5.1k  [0603]  24.64,82.3 270 top
R43  5.1k  [0603]  30.99,82.3 270 top
R44  100  [0603]  22.35,84.84 270 top
R45  100k  [0603]  31.37,99.42 270 top
R46  1M  [0603]  33.81,102.08 0 top
R47  330  [0603]  53.85,82.3 0 top
R48  10k  [0603]  14.48,97.54 270 top
R49  2.2k  [0603]  73.15,81.03 90 top
R50  2.2k  [0603]  74.68,81.03 90 top
R51  4.7k  [0603]  102.62,77.22 0 top
R52  2.2k  [0603]  107.7,87.38 0 top
R53  100k  [0603]  87.38,85.6 0 top
R54  2.2k  [0603]  107.7,84.84 0 top
R55  5.1k  [0603]  102.62,81.03 180 top
R56  5.1k  [0603]  102.57,79.15 180 top
R57  100k  [0603]  73.41,97.54 270 top
R58  5.1k  [0603]  78.49,82.3 270 top
R59  5.1k  [0603]  84.84,82.3 270 top
R60  100  [0603]  76.2,84.84 270 top
R61  100k  [0603]  85.22,99.42 270 top
R62  1M  [0603]  87.66,102.08 0 top
R63  330  [0603]  107.7,82.3 0 top
R64  10k  [0603]  68.33,97.54 270 top
R65  2.2k  [0603]  19.3,143.76 90 top
R66  2.2k  [0603]  20.83,143.76 90 top
R67  4.7k  [0603]  48.77,139.95 0 top
R68  2.2k  [0603]  53.85,150.11 0 top
R69  100k  [0603]  33.53,148.34 0 top
R70  2.2k  [0603]  53.85,147.57 0 top
R71  5.1k  [0603]  48.77,143.76 180 top
R72  5.1k  [0603]  48.72,141.88 180 top
R73  100k  [0603]  19.56,160.27 270 top
R74  5.1k  [0603]  24.64,145.03 270 top
R75  5.1k  [0603]  30.99,145.03 270 top
R76  100  [0603]  22.35,147.57 270 top
R77  100k  [0603]  31.37,162.15 270 top
R78  1M  [0603]  33.81,164.82 0 top
R79  330  [0603]  53.85,145.03 0 top
R80  10k  [0603]  14.48,160.27 270 top
R81  2.2k  [0603]  73.15,143.76 90 top
R82  2.2k  [0603]  74.68,143.76 90 top
R83  4.7k  [0603]  102.62,139.95 0 top
R84  2.2k  [0603]  107.7,150.11 0 top
R85  100k  [0603]  87.38,148.34 0 top
R86  2.2k  [0603]  107.7,147.57 0 top
R87  5.1k  [0603]  102.62,143.76 180 top
R88  5.1k  [0603]  102.57,141.88 180 top
R89  100k  [0603]  73.41,160.27 270 top
R90  5.1k  [0603]  78.49,145.03 270 top
R91  5.1k  [0603]  84.84,145.03 270 top
R92  100  [0603]  76.2,147.57 270 top
R93  100k  [0603]  85.22,162.15 270 top
R94  1M  [0603]  87.66,164.82 0 top
R95  330  [0603]  107.7,145.03 0 top
R96  10k  [0603]  68.33,160.27 270 top
RLED  JUMPER-SMT_2_NC_TRACE_SILK  [SMT-JUMPER_2_NC_TRACE_SILK]  57.66,22.1 180 bottom
RLED1  JUMPER-SMT_2_NC_TRACE_SILK  [SMT-JUMPER_2_NC_TRACE_SILK]  111.51,22.1 180 bottom
RLED2  JUMPER-SMT_2_NC_TRACE_SILK  [SMT-JUMPER_2_NC_TRACE_SILK]  57.66,84.84 180 bottom
RLED3  JUMPER-SMT_2_NC_TRACE_SILK  [SMT-JUMPER_2_NC_TRACE_SILK]  111.51,84.84 180 bottom
RLED4  JUMPER-SMT_2_NC_TRACE_SILK  [SMT-JUMPER_2_NC_TRACE_SILK]  57.66,147.57 180 bottom
RLED5  JUMPER-SMT_2_NC_TRACE_SILK  [SMT-JUMPER_2_NC_TRACE_SILK]  111.51,147.57 180 bottom
S1  [TACTILE_SWITCH_SMD_5.2MM]  11.94,14.48 270 top
S2  [TACTILE_SWITCH_SMD_5.2MM]  55.12,14.48 90 top
S3  [SWITCH_DPDT_SMD_AYZ0202]  17.02,28.45 270 top
S4  [TACTILE_SWITCH_SMD_5.2MM]  65.79,14.48 270 top
S5  [SWITCH_DPDT_SMD_AYZ0202]  52.58,33.53 90 top
S6  [TACTILE_SWITCH_SMD_5.2MM]  108.97,14.48 90 top
S7  [SWITCH_DPDT_SMD_AYZ0202]  70.87,28.45 270 top
S8  [SWITCH_DPDT_SMD_AYZ0202]  106.43,33.53 90 top
S9  [TACTILE_SWITCH_SMD_5.2MM]  11.94,77.22 270 top
S10  [TACTILE_SWITCH_SMD_5.2MM]  55.12,77.22 90 top
S11  [SWITCH_DPDT_SMD_AYZ0202]  17.02,91.19 270 top
S12  [SWITCH_DPDT_SMD_AYZ0202]  52.58,96.27 90 top
S13  [TACTILE_SWITCH_SMD_5.2MM]  65.79,77.22 270 top
S14  [TACTILE_SWITCH_SMD_5.2MM]  108.97,77.22 90 top
S15  [SWITCH_DPDT_SMD_AYZ0202]  70.87,91.19 270 top
S16  [SWITCH_DPDT_SMD_AYZ0202]  106.43,96.27 90 top
S17  [TACTILE_SWITCH_SMD_5.2MM]  11.94,139.95 270 top
S18  [TACTILE_SWITCH_SMD_5.2MM]  55.12,139.95 90 top
S19  [SWITCH_DPDT_SMD_AYZ0202]  17.02,153.92 270 top
S20  [SWITCH_DPDT_SMD_AYZ0202]  52.58,159 90 top
S21  [TACTILE_SWITCH_SMD_5.2MM]  65.79,139.95 270 top
S22  [TACTILE_SWITCH_SMD_5.2MM]  108.97,139.95 90 top
S23  [SWITCH_DPDT_SMD_AYZ0202]  70.87,153.92 270 top
S24  [SWITCH_DPDT_SMD_AYZ0202]  106.43,159 90 top
SHLD  JUMPER-SMT_2_NC_TRACE_SILK  [SMT-JUMPER_2_NC_TRACE_SILK]  45.62,12.47 0 bottom
SHLD1  JUMPER-SMT_2_NC_TRACE_SILK  [SMT-JUMPER_2_NC_TRACE_SILK]  24.1,12.65 180 bottom
SHLD2  JUMPER-SMT_2_NC_TRACE_SILK  [SMT-JUMPER_2_NC_TRACE_SILK]  99.47,12.47 0 bottom
SHLD3  JUMPER-SMT_2_NC_TRACE_SILK  [SMT-JUMPER_2_NC_TRACE_SILK]  77.95,12.65 180 bottom
SHLD4  JUMPER-SMT_2_NC_TRACE_SILK  [SMT-JUMPER_2_NC_TRACE_SILK]  45.62,75.21 0 bottom
SHLD5  JUMPER-SMT_2_NC_TRACE_SILK  [SMT-JUMPER_2_NC_TRACE_SILK]  24.1,75.39 180 bottom
SHLD6  JUMPER-SMT_2_NC_TRACE_SILK  [SMT-JUMPER_2_NC_TRACE_SILK]  99.47,75.21 0 bottom
SHLD7  JUMPER-SMT_2_NC_TRACE_SILK  [SMT-JUMPER_2_NC_TRACE_SILK]  77.95,75.39 180 bottom
SHLD8  JUMPER-SMT_2_NC_TRACE_SILK  [SMT-JUMPER_2_NC_TRACE_SILK]  45.62,137.95 0 bottom
SHLD9  JUMPER-SMT_2_NC_TRACE_SILK  [SMT-JUMPER_2_NC_TRACE_SILK]  24.1,138.13 180 bottom
SHLD10  JUMPER-SMT_2_NC_TRACE_SILK  [SMT-JUMPER_2_NC_TRACE_SILK]  99.47,137.95 0 bottom
SHLD11  JUMPER-SMT_2_NC_TRACE_SILK  [SMT-JUMPER_2_NC_TRACE_SILK]  77.95,138.13 180 bottom
U1  FSUSB30MUX_MSOP10  [MSOP10]  24.64,25.91 180 top
U2  AP63203  [SOT23-6]  33.53,25.91 0 top
U3  ESD Diode  [SOT-23-6]  28.45,19.56 180 top
U4  FT231XS  [SSOP20_L]  43.69,25.91 180 top
U5  ESD Diode  [SOT-23-6]  41.15,19.56 180 top
U6  AP63203  [SOT23-6]  87.38,25.91 0 top
U7  ESD Diode  [SOT-23-6]  95,19.56 180 top
U8  FSUSB30MUX_MSOP10  [MSOP10]  78.49,25.91 180 top
U9  ESD Diode  [SOT-23-6]  82.3,19.56 180 top
U10  FT231XS  [SSOP20_L]  97.54,25.91 180 top
U11  AP63203  [SOT23-6]  33.53,88.65 0 top
U12  ESD Diode  [SOT-23-6]  41.15,82.3 180 top
U13  FSUSB30MUX_MSOP10  [MSOP10]  24.64,88.65 180 top
U14  ESD Diode  [SOT-23-6]  28.45,82.3 180 top
U15  FT231XS  [SSOP20_L]  43.69,88.65 180 top
U16  AP63203  [SOT23-6]  87.38,88.65 0 top
U17  ESD Diode  [SOT-23-6]  95,82.3 180 top
U18  FSUSB30MUX_MSOP10  [MSOP10]  78.49,88.65 180 top
U19  ESD Diode  [SOT-23-6]  82.3,82.3 180 top
U20  FT231XS  [SSOP20_L]  97.54,88.65 180 top
U21  AP63203  [SOT23-6]  33.53,151.38 0 top
U22  ESD Diode  [SOT-23-6]  41.15,145.03 180 top
U23  FSUSB30MUX_MSOP10  [MSOP10]  24.64,151.38 180 top
U24  ESD Diode  [SOT-23-6]  28.45,145.03 180 top
U25  FT231XS  [SSOP20_L]  43.69,151.38 180 top
U26  AP63203  [SOT23-6]  87.38,151.38 0 top
U27  ESD Diode  [SOT-23-6]  95,145.03 180 top
U28  FSUSB30MUX_MSOP10  [MSOP10]  78.49,151.38 180 top
U29  ESD Diode  [SOT-23-6]  82.3,145.03 180 top
U30  FT231XS  [SSOP20_L]  97.54,151.38 180 top
U$1  [RSSI31]  57.66,23.37 0 top
U$2  [PWR29]  47.5,11.84 90 top
U$3  [#SDA#10]  11.94,22.1 0 top
U$4  [#SHLD#36]  42.16,12.45 0 bottom
U$5  [#NC#1]  26.16,41.15 0 bottom
U$6  [#D3#AD3#23]  45.21,51.18 0 bottom
U$7  [#NC#3]  43.43,43.69 0 bottom
U$8  [##DTR##27]  25.83,38.53 0 top
U$9  [#NC#1]  30.73,41.15 0 top
U$10  [#NC#3]  38.99,43.69 0 top
U$11  [#D1#AD1#8]  44.96,56.39 0 bottom
U$12  [##CTS##28]  43.69,38.61 0 top
U$13  [#D8##DTR##27]  24.38,38.61 0 bottom
U$14  [#RSSI#D10#17]  24,46.23 0 bottom
U$15  [#SDA#D11#9]  24.26,43.69 0 bottom
U$16  [##RST##15]  25.78,48.64 0 bottom
U$17  [#POCI#D12#24]  23.88,51.31 0 bottom
U$18  [#RXI#D14#15]  24.38,53.72 0 bottom
U$19  [#D2#AD2#19]  45.21,53.72 0 bottom
U$20  [#D6##RTS##25]  45.08,48.64 0 bottom
U$21  [#TXO#8]  31.37,56.39 0 top
U$22  [#TXO#D13#13]  23.88,56.39 0 bottom
U$23  [VIN5]  56.03,47.5 0 top
U$24  [#SCL#7]  11.94,19.56 0 top
U$25  [#GND#0]  12.06,27.18 0 top
U$26  [#I2C#33]  19.56,16.51 0 bottom
U$27  [#RXI#7]  30.96,53.82 0 top
U$28  [UART34]  41.15,16.76 0 top
U$29  [#GND#0]  54.99,41.12 0 top
U$30  [#RST#30]  8.13,14.48 90 top
U$31  [#PICO#27]  44.09,35.92 0 top
U$32  [#TXO#8]  12.19,64.01 0 top
U$33  [#RXI#7]  11.79,61.44 0 top
U$34  [#D9#6]  11.48,29.67 0 top
U$35  [#D5#ASSOC#25]  46.23,46.23 0 bottom
U$36  [#D9##SLP##28]  44.96,41.15 0 bottom
U$37  [#D7##CTS##26]  45.08,38.61 0 bottom
U$38  [#D4#PICO#25]  45.47,35.94 0 bottom
U$39  [#5V#5]  55.5,38.61 0 top
U$40  [D03]  51.31,14.48 90 top
U$41  [#GND#0]  54.97,43.64 0 top
U$42  [#D0#3]  11.53,32.21 0 top
U$43  [#X1#10]  50.04,40.08 90 top
U$44  [#3V3#1]  52.58,29.34 0 top
U$45  [#POCI#32]  31.37,51.31 0 top
U$46  [ON38]  49.07,34.8 0 top
U$47  [#3V3#1]  31.12,58.93 0 top
U$48  [#EN#17]  11.56,34.8 0 top
U$49  [#ALED#21]  54.1,24.64 0 bottom
U$50  [#GND#0]  25.76,36.07 0 top
U$51  [#RLED#22]  54.2,22.1 0 bottom
U$52  [#PLED#20]  52.37,12.4 0 bottom
U$53  [#GND#0]  55.02,43.64 0 bottom
U$54  [##RST##13]  30.99,48.77 0 top
U$55  [#RSSI#16]  31.24,46.23 0 top
U$56  [#SDA#10]  31.12,43.69 0 top
U$57  [#ASSOC#28]  37.46,46.23 0 top
U$58  [##RTS##14]  38.48,48.77 0 top
U$59  [##CS##26]  38.99,51.18 0 top
U$60  [#SCLK#33]  38.1,53.72 0 top
U$61  [SFE_LOGO_FLAME_.2]  17.14,62.99 0 top
U$62  [SFE_LOGO_NAME_.2]  34.8,65.28 0 bottom
U$63  [#GND#0]  54.99,41.12 0 bottom
U$64  [#SCL#9]  38.61,56.39 0 top
U$65  [#D0#3]  38.99,58.93 0 top
U$66  [#5V#5]  55.5,38.61 0 bottom
U$67  [#SDA#9]  11.94,22.1 0 bottom
U$68  [##SLP##28]  38.61,41.15 0 top
U$69  [OFF311]  48.64,32.31 0 top
U$70  [#SCL#13]  11.94,19.56 0 bottom
U$71  [DIRECT_USB33]  28.45,16.76 0 top
U$72  [#DUSB#31]  21.08,29.7 0 top
U$73  [#I2C#13751]  20.26,27.19 0 top
U$74  [ASC32]  57.66,26.16 0 top
U$75  [#SHLD1#37]  27.94,12.57 0 bottom
U$76  [#GND#0]  25.78,36.07 0 bottom
U$77  [#3V3#1]  25.78,58.8 0 bottom
U$78  [#D0#AD0#18]  45.21,58.93 0 bottom
U$79  [ARDUINO1345]  30.99,62.74 0 top
U$80  [XBEE340]  24.64,65.28 0 top
U$81  [SHIELD1346]  38.61,62.74 0 top
U$82  [#GND#0]  12.06,27.18 0 bottom
U$83  [#EN#15]  11.56,34.8 0 bottom
U$84  [#3V3#1]  55.04,36.07 0 bottom
U$85  [DEVELOPMENT1346]  34.8,65.28 0 top
U$86  [BOARD1347]  44.96,65.28 0 top
U$87  [##RST##13]  54.99,33.53 0 bottom
U$88  [#VIN#4]  55.24,46.23 0 bottom
U$89  [#D0#3416]  11.53,32.21 0 bottom
U$90  [#D9#3416]  11.48,29.67 0 bottom
U$91  [#I2C#33]  73.41,16.51 0 bottom
U$92  [D03]  105.16,14.48 90 top
U$93  [#IOLED#5]  53.92,19.46 0 bottom
U$94  [IO49]  57.68,20.75 0 top
U$95  [#RST#30]  61.98,14.48 90 top
U$96  [SFE_LOGO_FLAME_.2]  70.99,62.99 0 top
U$97  [#D1#AD1#8]  98.81,56.39 0 bottom
U$98  [#D2#AD2#19]  99.06,53.72 0 bottom
U$99  [#D3#AD3#23]  99.06,51.18 0 bottom
U$100  [#D6##RTS##25]  98.93,48.64 0 bottom
U$101  [#D5#ASSOC#25]  100.08,46.23 0 bottom
U$102  [#D9##SLP##28]  98.81,41.15 0 bottom
U$103  [#D7##CTS##26]  98.93,38.61 0 bottom
U$104  [#D4#PICO#25]  99.31,35.94 0 bottom
U$105  [#D8##DTR##27]  78.23,38.61 0 bottom
U$106  [#RSSI#D10#17]  77.85,46.23 0 bottom
U$107  [#SDA#D11#9]  78.11,43.69 0 bottom
U$108  [##RST##15]  79.63,48.64 0 bottom
U$109  [#POCI#D12#24]  77.72,51.31 0 bottom
U$110  [#RXI#D14#15]  78.23,53.72 0 bottom
U$111  [#TXO#D13#13]  77.72,56.39 0 bottom
U$112  [#EN#17]  65.41,34.8 0 top
U$113  [#ALED#21]  107.95,24.64 0 bottom
U$114  [#RLED#22]  108.05,22.1 0 bottom
U$115  [#TXO#8]  85.22,56.39 0 top
U$116  [#RXI#7]  84.81,53.82 0 top
U$117  [#POCI#32]  85.22,51.31 0 top
U$118  [##RST##13]  84.84,48.77 0 top
U$119  [#RSSI#16]  85.09,46.23 0 top
U$120  [#SDA#10]  84.96,43.69 0 top
U$121  [#ASSOC#28]  91.31,46.23 0 top
U$122  [##RTS##14]  92.33,48.77 0 top
U$123  [##CS##26]  92.84,51.18 0 top
U$124  [#SCLK#33]  91.95,53.72 0 top
U$125  [#SCL#9]  92.46,56.39 0 top
U$126  [#D0#3]  92.84,58.93 0 top
U$127  [#SHLD#36]  96.01,12.45 0 bottom
U$128  [#NC#1]  80.01,41.15 0 bottom
U$129  [#NC#3]  97.28,43.69 0 bottom
U$130  [#NC#3]  92.84,43.69 0 top
U$131  [UART34]  95,16.76 0 top
U$132  [#GND#0]  108.84,41.12 0 top
U$133  [#NC#1]  84.58,41.15 0 top
U$134  [#SDA#10]  65.79,22.1 0 top
U$135  [#SCL#7]  65.79,19.56 0 top
U$136  [#GND#0]  65.91,27.18 0 top
U$137  [#TXO#8]  66.04,64.01 0 top
U$138  [#RXI#7]  65.63,61.44 0 top
U$139  [#3V3#1]  84.96,58.93 0 top
U$140  [#GND#0]  79.6,36.07 0 top
U$141  [SFE_LOGO_NAME_.2]  88.65,65.28 0 bottom
U$142  [##SLP##28]  92.46,41.15 0 top
U$143  [DIRECT_USB33]  82.3,16.76 0 top
U$144  [#DUSB#31]  74.93,29.7 0 top
U$145  [ASC32]  111.51,26.16 0 top
U$146  [RSSI31]  111.51,23.37 0 top
U$147  [PWR29]  101.35,11.84 90 top
U$148  [#SHLD1#37]  81.79,12.57 0 bottom
U$149  [#GND#0]  79.63,36.07 0 bottom
U$150  [#3V3#1]  79.63,58.8 0 bottom
U$151  [#D0#AD0#18]  99.06,58.93 0 bottom
U$152  [ARDUINO1345]  84.84,62.74 0 top
U$153  [XBEE340]  78.49,65.28 0 top
U$154  [SHIELD1346]  92.46,62.74 0 top
U$155  [#5V#5]  109.35,38.61 0 top
U$156  [DEVELOPMENT1346]  88.65,65.28 0 top
U$157  [BOARD1347]  98.81,65.28 0 top
U$158  [#I2C#13751]  74.11,27.19 0 top
U$159  [##DTR##27]  79.68,38.53 0 top
U$160  [##CTS##28]  97.54,38.61 0 top
U$161  [#GND#0]  108.81,43.64 0 top
U$162  [#3V3#1]  106.43,29.34 0 top
U$163  [OFF311]  102.49,32.31 0 top
U$164  [#PLED#20]  106.22,12.4 0 bottom
U$165  [#IOLED#5]  107.77,19.46 0 bottom
U$166  [IO49]  111.53,20.75 0 top
U$167  [VIN5]  109.88,47.5 0 top
U$168  [#PICO#27]  97.94,35.92 0 top
U$169  [#D9#6]  65.33,29.67 0 top
U$170  [#D0#3]  65.38,32.21 0 top
U$171  [#X1#10]  103.89,40.08 90 top
U$172  [ON38]  102.92,34.8 0 top
U$173  [#GND#0]  108.86,43.64 0 bottom
U$174  [#GND#0]  108.84,41.12 0 bottom
U$175  [#5V#5]  109.35,38.61 0 bottom
U$176  [#SDA#9]  65.79,22.1 0 bottom
U$177  [#SCL#13]  65.79,19.56 0 bottom
U$178  [#GND#0]  65.91,27.18 0 bottom
U$179  [#EN#15]  65.41,34.8 0 bottom
U$180  [#3V3#1]  108.89,36.07 0 bottom
U$181  [##RST##13]  108.84,33.53 0 bottom
U$182  [#VIN#4]  109.09,46.23 0 bottom
U$183  [#D0#3416]  65.38,32.21 0 bottom
U$184  [#D9#3416]  65.33,29.67 0 bottom
U$185  [#I2C#33]  19.56,79.25 0 bottom
U$186  [D03]  51.31,77.22 90 top
U$187  [#RST#30]  8.13,77.22 90 top
U$188  [SFE_LOGO_FLAME_.2]  17.14,125.73 0 top
U$189  [#D1#AD1#8]  44.96,119.13 0 bottom
U$190  [#D2#AD2#19]  45.21,116.46 0 bottom
U$191  [#D3#AD3#23]  45.21,113.92 0 bottom
U$192  [#D6##RTS##25]  45.08,111.38 0 bottom
U$193  [#D5#ASSOC#25]  46.23,108.97 0 bottom
U$194  [#D9##SLP##28]  44.96,103.89 0 bottom
U$195  [#D7##CTS##26]  45.08,101.35 0 bottom
U$196  [#D4#PICO#25]  45.47,98.68 0 bottom
U$197  [#D8##DTR##27]  24.38,101.35 0 bottom
U$198  [#RSSI#D10#17]  24,108.97 0 bottom
U$199  [#SDA#D11#9]  24.26,106.43 0 bottom
U$200  [##RST##15]  25.78,111.38 0 bottom
U$201  [#POCI#D12#24]  23.88,114.05 0 bottom
U$202  [#RXI#D14#15]  24.38,116.46 0 bottom
U$203  [#TXO#D13#13]  23.88,119.13 0 bottom
U$204  [#EN#17]  11.56,97.54 0 top
U$205  [#ALED#21]  54.1,87.38 0 bottom
U$206  [#RLED#22]  54.2,84.84 0 bottom
U$207  [#TXO#8]  31.37,119.13 0 top
U$208  [#RXI#7]  30.96,116.56 0 top
U$209  [#POCI#32]  31.37,114.05 0 top
U$210  [##RST##13]  30.99,111.51 0 top
U$211  [#RSSI#16]  31.24,108.97 0 top
U$212  [#SDA#10]  31.12,106.43 0 top
U$213  [#ASSOC#28]  37.46,108.97 0 top
U$214  [##RTS##14]  38.48,111.51 0 top
U$215  [##CS##26]  38.99,113.92 0 top
U$216  [#SCLK#33]  38.1,116.46 0 top
U$217  [#SCL#9]  38.61,119.13 0 top
U$218  [#D0#3]  38.99,121.67 0 top
U$219  [#SHLD#36]  42.16,75.18 0 bottom
U$220  [#NC#1]  26.16,103.89 0 bottom
U$221  [#NC#3]  43.43,106.43 0 bottom
U$222  [#NC#3]  38.99,106.43 0 top
U$223  [UART34]  41.15,79.5 0 top
U$224  [#GND#0]  54.99,103.86 0 top
U$225  [#NC#1]  30.73,103.89 0 top
U$226  [#SDA#10]  11.94,84.84 0 top
U$227  [#SCL#7]  11.94,82.3 0 top
U$228  [#GND#0]  12.06,89.92 0 top
U$229  [#TXO#8]  12.19,126.75 0 top
U$230  [#RXI#7]  11.79,124.18 0 top
U$231  [#3V3#1]  31.12,121.67 0 top
U$232  [#GND#0]  25.76,98.81 0 top
U$233  [SFE_LOGO_NAME_.2]  34.8,128.02 0 bottom
U$234  [##SLP##28]  38.61,103.89 0 top
U$235  [DIRECT_USB33]  28.45,79.5 0 top
U$236  [#DUSB#31]  21.08,92.44 0 top
U$237  [ASC32]  57.66,88.9 0 top
U$238  [RSSI31]  57.66,86.11 0 top
U$239  [PWR29]  47.5,74.57 90 top
U$240  [#SHLD1#37]  27.94,75.31 0 bottom
U$241  [#GND#0]  25.78,98.81 0 bottom
U$242  [#3V3#1]  25.78,121.54 0 bottom
U$243  [#D0#AD0#18]  45.21,121.67 0 bottom
U$244  [ARDUINO1345]  30.99,125.48 0 top
U$245  [XBEE340]  24.64,128.02 0 top
U$246  [SHIELD1346]  38.61,125.48 0 top
U$247  [#5V#5]  55.5,101.35 0 top
U$248  [DEVELOPMENT1346]  34.8,128.02 0 top
U$249  [BOARD1347]  44.96,128.02 0 top
U$250  [#I2C#13751]  20.26,89.93 0 top
U$251  [##DTR##27]  25.83,101.27 0 top
U$252  [##CTS##28]  43.69,101.35 0 top
U$253  [#GND#0]  54.97,106.38 0 top
U$254  [#3V3#1]  52.58,92.08 0 top
U$255  [OFF311]  48.64,95.05 0 top
U$256  [#PLED#20]  52.37,75.13 0 bottom
U$257  [#IOLED#5]  53.92,82.19 0 bottom
U$258  [IO49]  57.68,83.49 0 top
U$259  [VIN5]  56.03,110.24 0 top
U$260  [#PICO#27]  44.09,98.65 0 top
U$261  [#D9#6]  11.48,92.41 0 top
U$262  [#D0#3]  11.53,94.95 0 top
U$263  [#X1#10]  50.04,102.82 90 top
U$264  [ON38]  49.07,97.54 0 top
U$265  [#GND#0]  55.02,106.38 0 bottom
U$266  [#GND#0]  54.99,103.86 0 bottom
U$267  [#5V#5]  55.5,101.35 0 bottom
U$268  [#SDA#9]  11.94,84.84 0 bottom
U$269  [#SCL#13]  11.94,82.3 0 bottom
U$270  [#GND#0]  12.06,89.92 0 bottom
U$271  [#EN#15]  11.56,97.54 0 bottom
U$272  [#3V3#1]  55.04,98.81 0 bottom
U$273  [##RST##13]  54.99,96.27 0 bottom
U$274  [#VIN#4]  55.24,108.97 0 bottom
U$275  [#D0#3416]  11.53,94.95 0 bottom
U$276  [#D9#3416]  11.48,92.41 0 bottom
U$277  [#I2C#33]  73.41,79.25 0 bottom
U$278  [D03]  105.16,77.22 90 top
U$279  [#RST#30]  61.98,77.22 90 top
U$280  [SFE_LOGO_FLAME_.2]  70.99,125.73 0 top
U$281  [#D1#AD1#8]  98.81,119.13 0 bottom
U$282  [#D2#AD2#19]  99.06,116.46 0 bottom
U$283  [#D3#AD3#23]  99.06,113.92 0 bottom
U$284  [#D6##RTS##25]  98.93,111.38 0 bottom
U$285  [#D5#ASSOC#25]  100.08,108.97 0 bottom
U$286  [#D9##SLP##28]  98.81,103.89 0 bottom
U$287  [#D7##CTS##26]  98.93,101.35 0 bottom
U$288  [#D4#PICO#25]  99.31,98.68 0 bottom
U$289  [#D8##DTR##27]  78.23,101.35 0 bottom
U$290  [#RSSI#D10#17]  77.85,108.97 0 bottom
U$291  [#SDA#D11#9]  78.11,106.43 0 bottom
U$292  [##RST##15]  79.63,111.38 0 bottom
U$293  [#POCI#D12#24]  77.72,114.05 0 bottom
U$294  [#RXI#D14#15]  78.23,116.46 0 bottom
U$295  [#TXO#D13#13]  77.72,119.13 0 bottom
U$296  [#EN#17]  65.41,97.54 0 top
U$297  [#ALED#21]  107.95,87.38 0 bottom
U$298  [#RLED#22]  108.05,84.84 0 bottom
U$299  [#TXO#8]  85.22,119.13 0 top
U$300  [#RXI#7]  84.81,116.56 0 top
U$301  [#POCI#32]  85.22,114.05 0 top
U$302  [##RST##13]  84.84,111.51 0 top
U$303  [#RSSI#16]  85.09,108.97 0 top
U$304  [#SDA#10]  84.96,106.43 0 top
U$305  [#ASSOC#28]  91.31,108.97 0 top
U$306  [##RTS##14]  92.33,111.51 0 top
U$307  [##CS##26]  92.84,113.92 0 top
U$308  [#SCLK#33]  91.95,116.46 0 top
U$309  [#SCL#9]  92.46,119.13 0 top
U$310  [#D0#3]  92.84,121.67 0 top
U$311  [#SHLD#36]  96.01,75.18 0 bottom
U$312  [#NC#1]  80.01,103.89 0 bottom
U$313  [#NC#3]  97.28,106.43 0 bottom
U$314  [#NC#3]  92.84,106.43 0 top
U$315  [UART34]  95,79.5 0 top
U$316  [#GND#0]  108.84,103.86 0 top
U$317  [#NC#1]  84.58,103.89 0 top
U$318  [#SDA#10]  65.79,84.84 0 top
U$319  [#SCL#7]  65.79,82.3 0 top
U$320  [#GND#0]  65.91,89.92 0 top
U$321  [#TXO#8]  66.04,126.75 0 top
U$322  [#RXI#7]  65.63,124.18 0 top
U$323  [#3V3#1]  84.96,121.67 0 top
U$324  [#GND#0]  79.6,98.81 0 top
U$325  [SFE_LOGO_NAME_.2]  88.65,128.02 0 bottom
U$326  [##SLP##28]  92.46,103.89 0 top
U$327  [DIRECT_USB33]  82.3,79.5 0 top
U$328  [#DUSB#31]  74.93,92.44 0 top
U$329  [ASC32]  111.51,88.9 0 top
U$330  [RSSI31]  111.51,86.11 0 top
U$331  [PWR29]  101.35,74.57 90 top
U$332  [#SHLD1#37]  81.79,75.31 0 bottom
U$333  [#GND#0]  79.63,98.81 0 bottom
U$334  [#3V3#1]  79.63,121.54 0 bottom
U$335  [#D0#AD0#18]  99.06,121.67 0 bottom
U$336  [ARDUINO1345]  84.84,125.48 0 top
U$337  [XBEE340]  78.49,128.02 0 top
U$338  [SHIELD1346]  92.46,125.48 0 top
U$339  [#5V#5]  109.35,101.35 0 top
U$340  [DEVELOPMENT1346]  88.65,128.02 0 top
U$341  [BOARD1347]  98.81,128.02 0 top
U$342  [#I2C#13751]  74.11,89.93 0 top
U$343  [##DTR##27]  79.68,101.27 0 top
U$344  [##CTS##28]  97.54,101.35 0 top
U$345  [#GND#0]  108.81,106.38 0 top
U$346  [#3V3#1]  106.43,92.08 0 top
U$347  [OFF311]  102.49,95.05 0 top
U$348  [#PLED#20]  106.22,75.13 0 bottom
U$349  [#IOLED#5]  107.77,82.19 0 bottom
U$350  [IO49]  111.53,83.49 0 top
U$351  [VIN5]  109.88,110.24 0 top
U$352  [#PICO#27]  97.94,98.65 0 top
U$353  [#D9#6]  65.33,92.41 0 top
U$354  [#D0#3]  65.38,94.95 0 top
U$355  [#X1#10]  103.89,102.82 90 top
U$356  [ON38]  102.92,97.54 0 top
U$357  [#GND#0]  108.86,106.38 0 bottom
U$358  [#GND#0]  108.84,103.86 0 bottom
U$359  [#5V#5]  109.35,101.35 0 bottom
U$360  [#SDA#9]  65.79,84.84 0 bottom
U$361  [#SCL#13]  65.79,82.3 0 bottom
U$362  [#GND#0]  65.91,89.92 0 bottom
U$363  [#EN#15]  65.41,97.54 0 bottom
U$364  [#3V3#1]  108.89,98.81 0 bottom
U$365  [##RST##13]  108.84,96.27 0 bottom
U$366  [#VIN#4]  109.09,108.97 0 bottom
U$367  [#D0#3416]  65.38,94.95 0 bottom
U$368  [#D9#3416]  65.33,92.41 0 bottom
U$369  [#I2C#33]  19.56,141.99 0 bottom
U$370  [D03]  51.31,139.95 90 top
U$371  [#RST#30]  8.13,139.95 90 top
U$372  [SFE_LOGO_FLAME_.2]  17.14,188.47 0 top
U$373  [#D1#AD1#8]  44.96,181.86 0 bottom
U$374  [#D2#AD2#19]  45.21,179.2 0 bottom
U$375  [#D3#AD3#23]  45.21,176.66 0 bottom
U$376  [#D6##RTS##25]  45.08,174.12 0 bottom
U$377  [#D5#ASSOC#25]  46.23,171.7 0 bottom
U$378  [#D9##SLP##28]  44.96,166.62 0 bottom
U$379  [#D7##CTS##26]  45.08,164.08 0 bottom
U$380  [#D4#PICO#25]  45.47,161.42 0 bottom
U$381  [#D8##DTR##27]  24.38,164.08 0 bottom
U$382  [#RSSI#D10#17]  24,171.7 0 bottom
U$383  [#SDA#D11#9]  24.26,169.16 0 bottom
U$384  [##RST##15]  25.78,174.12 0 bottom
U$385  [#POCI#D12#24]  23.88,176.78 0 bottom
U$386  [#RXI#D14#15]  24.38,179.2 0 bottom
U$387  [#TXO#D13#13]  23.88,181.86 0 bottom
U$388  [#EN#17]  11.56,160.27 0 top
U$389  [#ALED#21]  54.1,150.11 0 bottom
U$390  [#RLED#22]  54.2,147.57 0 bottom
U$391  [#TXO#8]  31.37,181.86 0 top
U$392  [#RXI#7]  30.96,179.3 0 top
U$393  [#POCI#32]  31.37,176.78 0 top
U$394  [##RST##13]  30.99,174.24 0 top
U$395  [#RSSI#16]  31.24,171.7 0 top
U$396  [#SDA#10]  31.12,169.16 0 top
U$397  [#ASSOC#28]  37.46,171.7 0 top
U$398  [##RTS##14]  38.48,174.24 0 top
U$399  [##CS##26]  38.99,176.66 0 top
U$400  [#SCLK#33]  38.1,179.2 0 top
U$401  [#SCL#9]  38.61,181.86 0 top
U$402  [#D0#3]  38.99,184.4 0 top
U$403  [#SHLD#36]  42.16,137.92 0 bottom
U$404  [#NC#1]  26.16,166.62 0 bottom
U$405  [#NC#3]  43.43,169.16 0 bottom
U$406  [#NC#3]  38.99,169.16 0 top
U$407  [UART34]  41.15,142.24 0 top
U$408  [#GND#0]  54.99,166.6 0 top
U$409  [#NC#1]  30.73,166.62 0 top
U$410  [#SDA#10]  11.94,147.57 0 top
U$411  [#SCL#7]  11.94,145.03 0 top
U$412  [#GND#0]  12.06,152.65 0 top
U$413  [#TXO#8]  12.19,189.48 0 top
U$414  [#RXI#7]  11.79,186.92 0 top
U$415  [#3V3#1]  31.12,184.4 0 top
U$416  [#GND#0]  25.76,161.54 0 top
U$417  [SFE_LOGO_NAME_.2]  34.8,190.75 0 bottom
U$418  [##SLP##28]  38.61,166.62 0 top
U$419  [DIRECT_USB33]  28.45,142.24 0 top
U$420  [#DUSB#31]  21.08,155.18 0 top
U$421  [ASC32]  57.66,151.64 0 top
U$422  [RSSI31]  57.66,148.84 0 top
U$423  [PWR29]  47.5,137.31 90 top
U$424  [#SHLD1#37]  27.94,138.05 0 bottom
U$425  [#GND#0]  25.78,161.54 0 bottom
U$426  [#3V3#1]  25.78,184.28 0 bottom
U$427  [#D0#AD0#18]  45.21,184.4 0 bottom
U$428  [ARDUINO1345]  30.99,188.21 0 top
U$429  [XBEE340]  24.64,190.75 0 top
U$430  [SHIELD1346]  38.61,188.21 0 top
U$431  [#5V#5]  55.5,164.08 0 top
U$432  [DEVELOPMENT1346]  34.8,190.75 0 top
U$433  [BOARD1347]  44.96,190.75 0 top
U$434  [#I2C#13751]  20.26,152.66 0 top
U$435  [##DTR##27]  25.83,164.01 0 top
U$436  [##CTS##28]  43.69,164.08 0 top
U$437  [#GND#0]  54.97,169.11 0 top
U$438  [#3V3#1]  52.58,154.81 0 top
U$439  [OFF311]  48.64,157.78 0 top
U$440  [#PLED#20]  52.37,137.87 0 bottom
U$441  [#IOLED#5]  53.92,144.93 0 bottom
U$442  [IO49]  57.68,146.23 0 top
U$443  [VIN5]  56.03,172.97 0 top
U$444  [#PICO#27]  44.09,161.39 0 top
U$445  [#D9#6]  11.48,155.14 0 top
U$446  [#D0#3]  11.53,157.68 0 top
U$447  [#X1#10]  50.04,165.56 90 top
U$448  [ON38]  49.07,160.27 0 top
U$449  [#GND#0]  55.02,169.11 0 bottom
U$450  [#GND#0]  54.99,166.6 0 bottom
U$451  [#5V#5]  55.5,164.08 0 bottom
U$452  [#SDA#9]  11.94,147.57 0 bottom
U$453  [#SCL#13]  11.94,145.03 0 bottom
U$454  [#GND#0]  12.06,152.65 0 bottom
U$455  [#EN#15]  11.56,160.27 0 bottom
U$456  [#3V3#1]  55.04,161.54 0 bottom
U$457  [##RST##13]  54.99,159 0 bottom
U$458  [#VIN#4]  55.24,171.7 0 bottom
U$459  [#D0#3416]  11.53,157.68 0 bottom
U$460  [#D9#3416]  11.48,155.14 0 bottom
U$461  [#I2C#33]  73.41,141.99 0 bottom
U$462  [D03]  105.16,139.95 90 top
U$463  [#RST#30]  61.98,139.95 90 top
U$464  [SFE_LOGO_FLAME_.2]  70.99,188.47 0 top
U$465  [#D1#AD1#8]  98.81,181.86 0 bottom
U$466  [#D2#AD2#19]  99.06,179.2 0 bottom
U$467  [#D3#AD3#23]  99.06,176.66 0 bottom
U$468  [#D6##RTS##25]  98.93,174.12 0 bottom
U$469  [#D5#ASSOC#25]  100.08,171.7 0 bottom
U$470  [#D9##SLP##28]  98.81,166.62 0 bottom
U$471  [#D7##CTS##26]  98.93,164.08 0 bottom
U$472  [#D4#PICO#25]  99.31,161.42 0 bottom
U$473  [#D8##DTR##27]  78.23,164.08 0 bottom
U$474  [#RSSI#D10#17]  77.85,171.7 0 bottom
U$475  [#SDA#D11#9]  78.11,169.16 0 bottom
U$476  [##RST##15]  79.63,174.12 0 bottom
U$477  [#POCI#D12#24]  77.72,176.78 0 bottom
U$478  [#RXI#D14#15]  78.23,179.2 0 bottom
U$479  [#TXO#D13#13]  77.72,181.86 0 bottom
U$480  [#EN#17]  65.41,160.27 0 top
U$481  [#ALED#21]  107.95,150.11 0 bottom
U$482  [#RLED#22]  108.05,147.57 0 bottom
U$483  [#TXO#8]  85.22,181.86 0 top
U$484  [#RXI#7]  84.81,179.3 0 top
U$485  [#POCI#32]  85.22,176.78 0 top
U$486  [##RST##13]  84.84,174.24 0 top
U$487  [#RSSI#16]  85.09,171.7 0 top
U$488  [#SDA#10]  84.96,169.16 0 top
U$489  [#ASSOC#28]  91.31,171.7 0 top
U$490  [##RTS##14]  92.33,174.24 0 top
U$491  [##CS##26]  92.84,176.66 0 top
U$492  [#SCLK#33]  91.95,179.2 0 top
U$493  [#SCL#9]  92.46,181.86 0 top
U$494  [#D0#3]  92.84,184.4 0 top
U$495  [#SHLD#36]  96.01,137.92 0 bottom
U$496  [#NC#1]  80.01,166.62 0 bottom
U$497  [#NC#3]  97.28,169.16 0 bottom
U$498  [#NC#3]  92.84,169.16 0 top
U$499  [UART34]  95,142.24 0 top
U$500  [#GND#0]  108.84,166.6 0 top
U$501  [#NC#1]  84.58,166.62 0 top
U$502  [#SDA#10]  65.79,147.57 0 top
U$503  [#SCL#7]  65.79,145.03 0 top
U$504  [#GND#0]  65.91,152.65 0 top
U$505  [#TXO#8]  66.04,189.48 0 top
U$506  [#RXI#7]  65.63,186.92 0 top
U$507  [#3V3#1]  84.96,184.4 0 top
U$508  [#GND#0]  79.6,161.54 0 top
U$509  [SFE_LOGO_NAME_.2]  88.65,190.75 0 bottom
U$510  [##SLP##28]  92.46,166.62 0 top
U$511  [DIRECT_USB33]  82.3,142.24 0 top
U$512  [#DUSB#31]  74.93,155.18 0 top
U$513  [ASC32]  111.51,151.64 0 top
U$514  [RSSI31]  111.51,148.84 0 top
U$515  [PWR29]  101.35,137.31 90 top
U$516  [#SHLD1#37]  81.79,138.05 0 bottom
U$517  [#GND#0]  79.63,161.54 0 bottom
U$518  [#3V3#1]  79.63,184.28 0 bottom
U$519  [#D0#AD0#18]  99.06,184.4 0 bottom
U$520  [ARDUINO1345]  84.84,188.21 0 top
U$521  [XBEE340]  78.49,190.75 0 top
U$522  [SHIELD1346]  92.46,188.21 0 top
U$523  [#5V#5]  109.35,164.08 0 top
U$524  [DEVELOPMENT1346]  88.65,190.75 0 top
U$525  [BOARD1347]  98.81,190.75 0 top
U$526  [#I2C#13751]  74.11,152.66 0 top
U$527  [##DTR##27]  79.68,164.01 0 top
U$528  [##CTS##28]  97.54,164.08 0 top
U$529  [#GND#0]  108.81,169.11 0 top
U$530  [#3V3#1]  106.43,154.81 0 top
U$531  [OFF311]  102.49,157.78 0 top
U$532  [#PLED#20]  106.22,137.87 0 bottom
U$533  [#IOLED#5]  107.77,144.93 0 bottom
U$534  [IO49]  111.53,146.23 0 top
U$535  [VIN5]  109.88,172.97 0 top
U$536  [#PICO#27]  97.94,161.39 0 top
U$537  [#D9#6]  65.33,155.14 0 top
U$538  [#D0#3]  65.38,157.68 0 top
U$539  [#X1#10]  103.89,165.56 90 top
U$540  [ON38]  102.92,160.27 0 top
U$541  [#GND#0]  108.86,169.11 0 bottom
U$542  [#GND#0]  108.84,166.6 0 bottom
U$543  [#5V#5]  109.35,164.08 0 bottom
U$544  [#SDA#9]  65.79,147.57 0 bottom
U$545  [#SCL#13]  65.79,145.03 0 bottom
U$546  [#GND#0]  65.91,152.65 0 bottom
U$547  [#EN#15]  65.41,160.27 0 bottom
U$548  [#3V3#1]  108.89,161.54 0 bottom
U$549  [##RST##13]  108.84,159 0 bottom
U$550  [#VIN#4]  109.09,171.7 0 bottom
U$551  [#D0#3416]  65.38,157.68 0 bottom
U$552  [#D9#3416]  65.33,155.14 0 bottom
UART  USB Female Type C Connector  [USB-C-16P-4LAYER-ISOLATED]  41.15,15.75 0 top
UART1  USB Female Type C Connector  [USB-C-16P-4LAYER-ISOLATED]  95,15.75 0 top
UART2  USB Female Type C Connector  [USB-C-16P-4LAYER-ISOLATED]  41.15,78.49 0 top
UART3  USB Female Type C Connector  [USB-C-16P-4LAYER-ISOLATED]  95,78.49 0 top
UART4  USB Female Type C Connector  [USB-C-16P-4LAYER-ISOLATED]  41.15,141.22 0 top
UART5  USB Female Type C Connector  [USB-C-16P-4LAYER-ISOLATED]  95,141.22 0 top
X1  JUMPER-SMT_2_NO_SILK  [SMT-JUMPER_2_NO_SILK]  50.04,42.42 90 top
X2  JUMPER-SMT_2_NO_SILK  [SMT-JUMPER_2_NO_SILK]  103.89,42.42 90 top
X3  JUMPER-SMT_2_NO_SILK  [SMT-JUMPER_2_NO_SILK]  50.04,105.16 90 top
X4  JUMPER-SMT_2_NO_SILK  [SMT-JUMPER_2_NO_SILK]  103.89,105.16 90 top
X5  JUMPER-SMT_2_NO_SILK  [SMT-JUMPER_2_NO_SILK]  50.04,167.89 90 top
X6  JUMPER-SMT_2_NO_SILK  [SMT-JUMPER_2_NO_SILK]  103.89,167.89 90 top